# EAGLE board HFT-Core-Module_1V1 (EAGLE 7.7.0), part 1 of 4
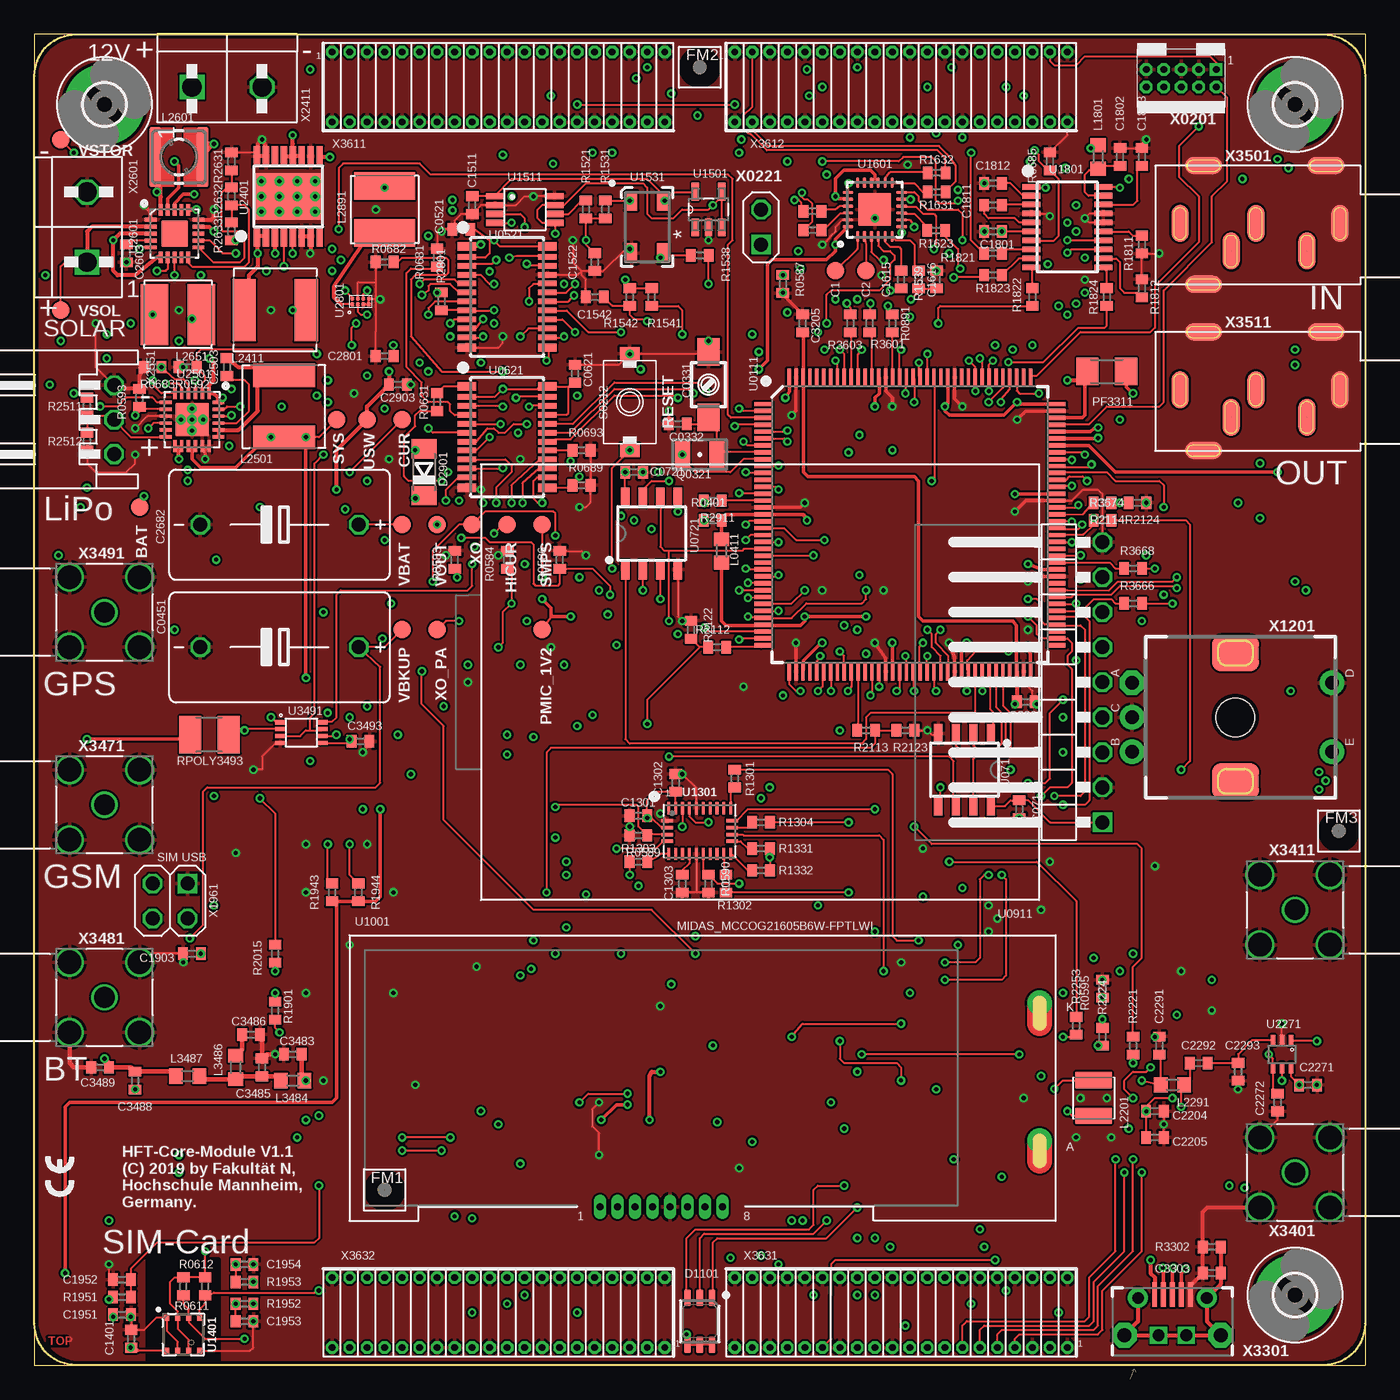
[diagram p0: board, top side]
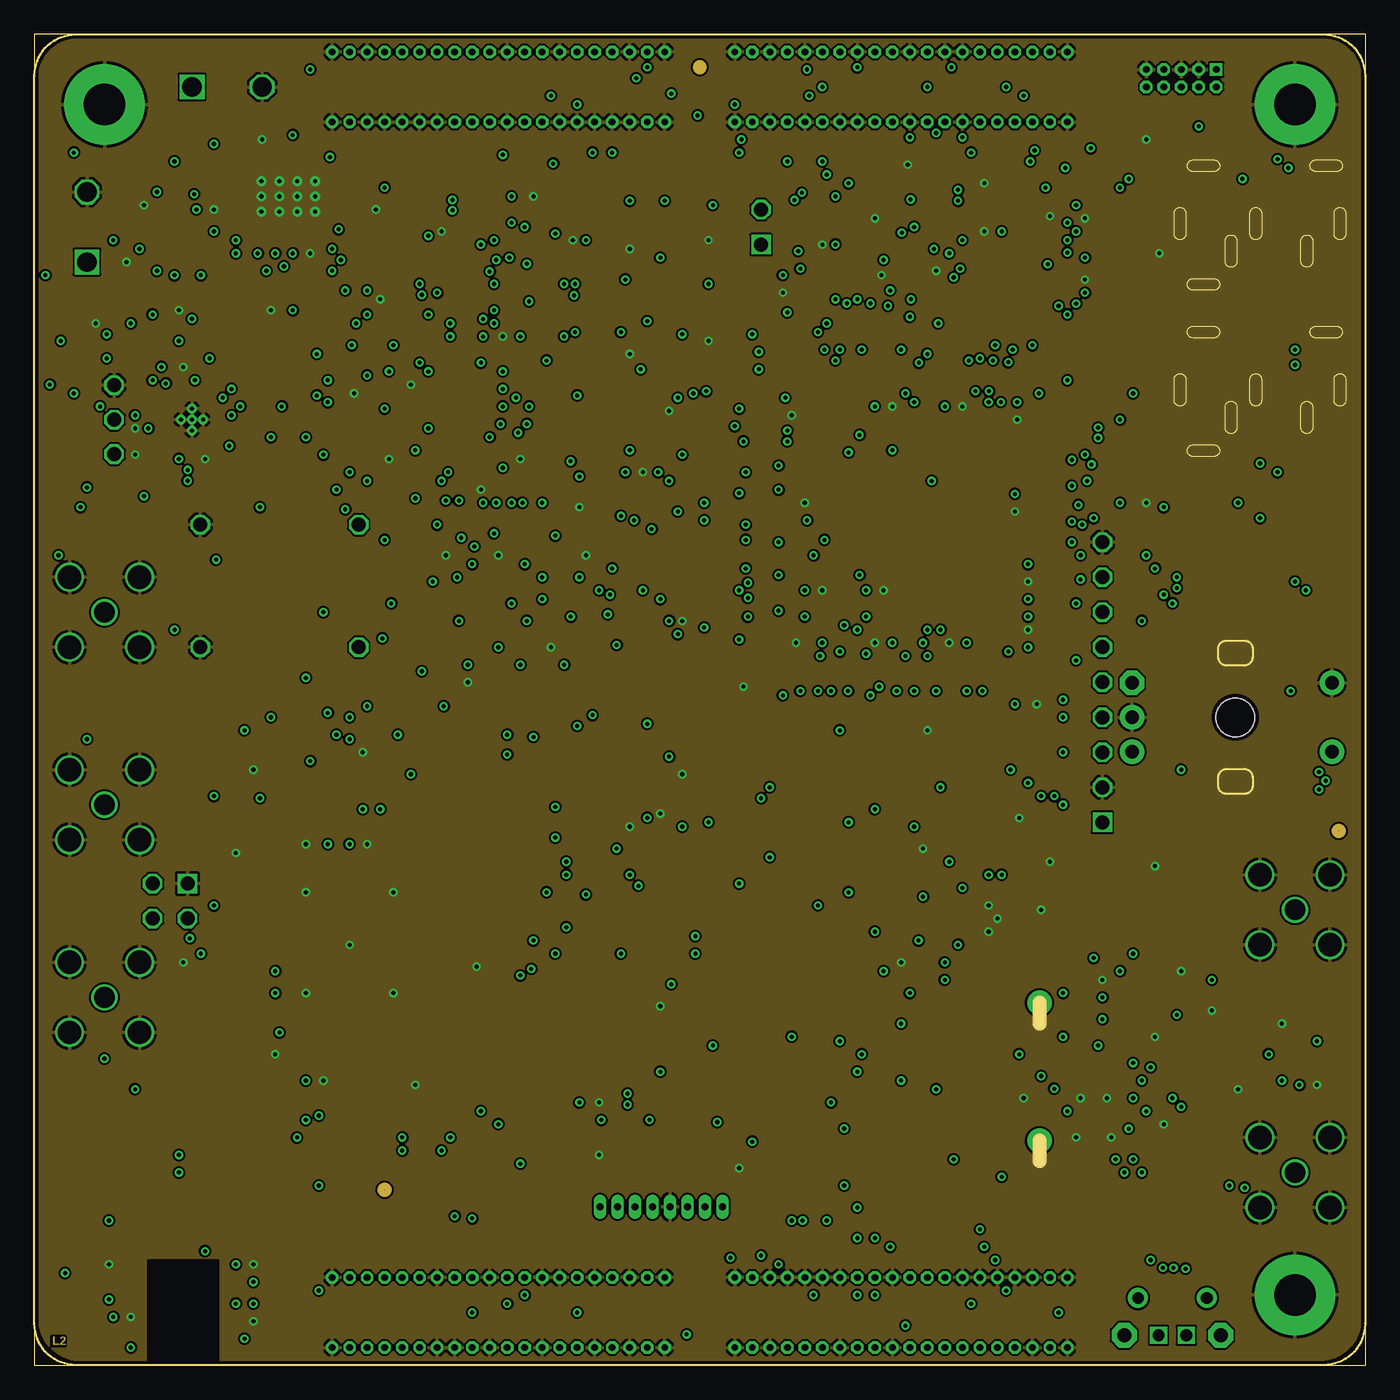
[diagram p1: board, inner layer Route2_GND_(Signal2)]
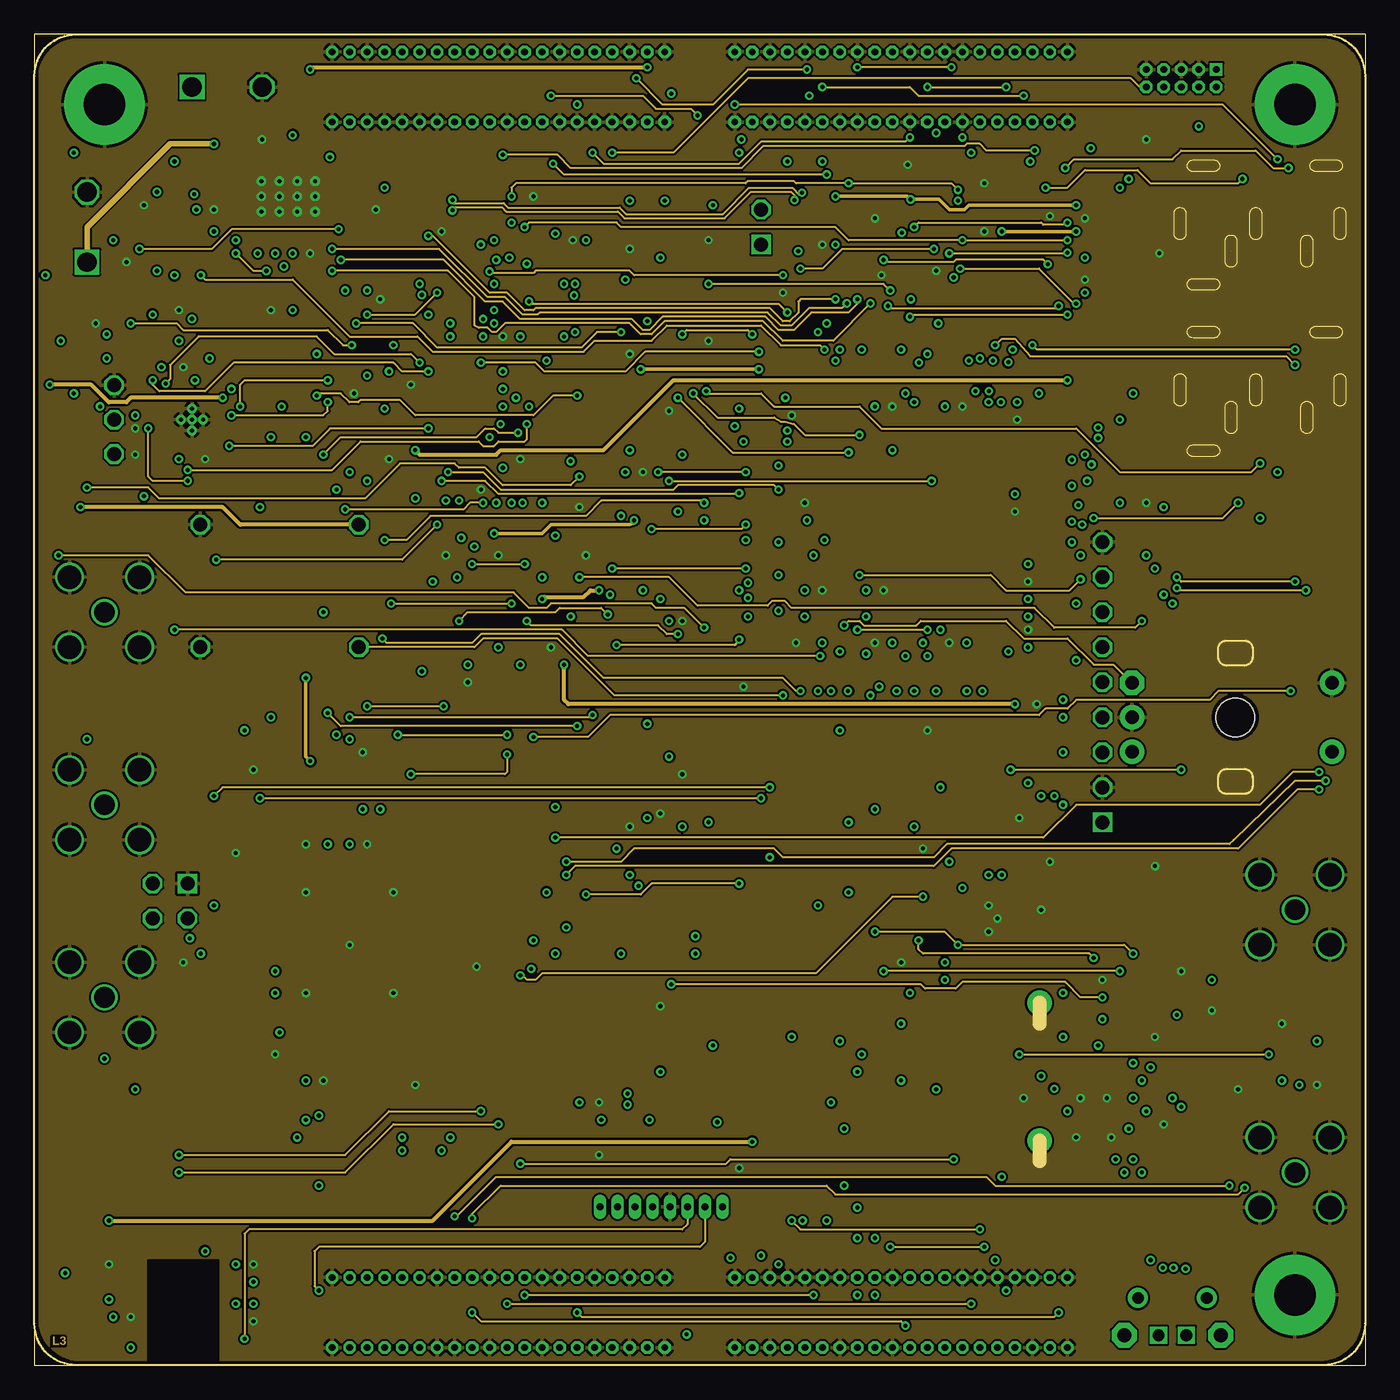
[diagram p2: board, inner layer Route3_Signal3_(GND)]
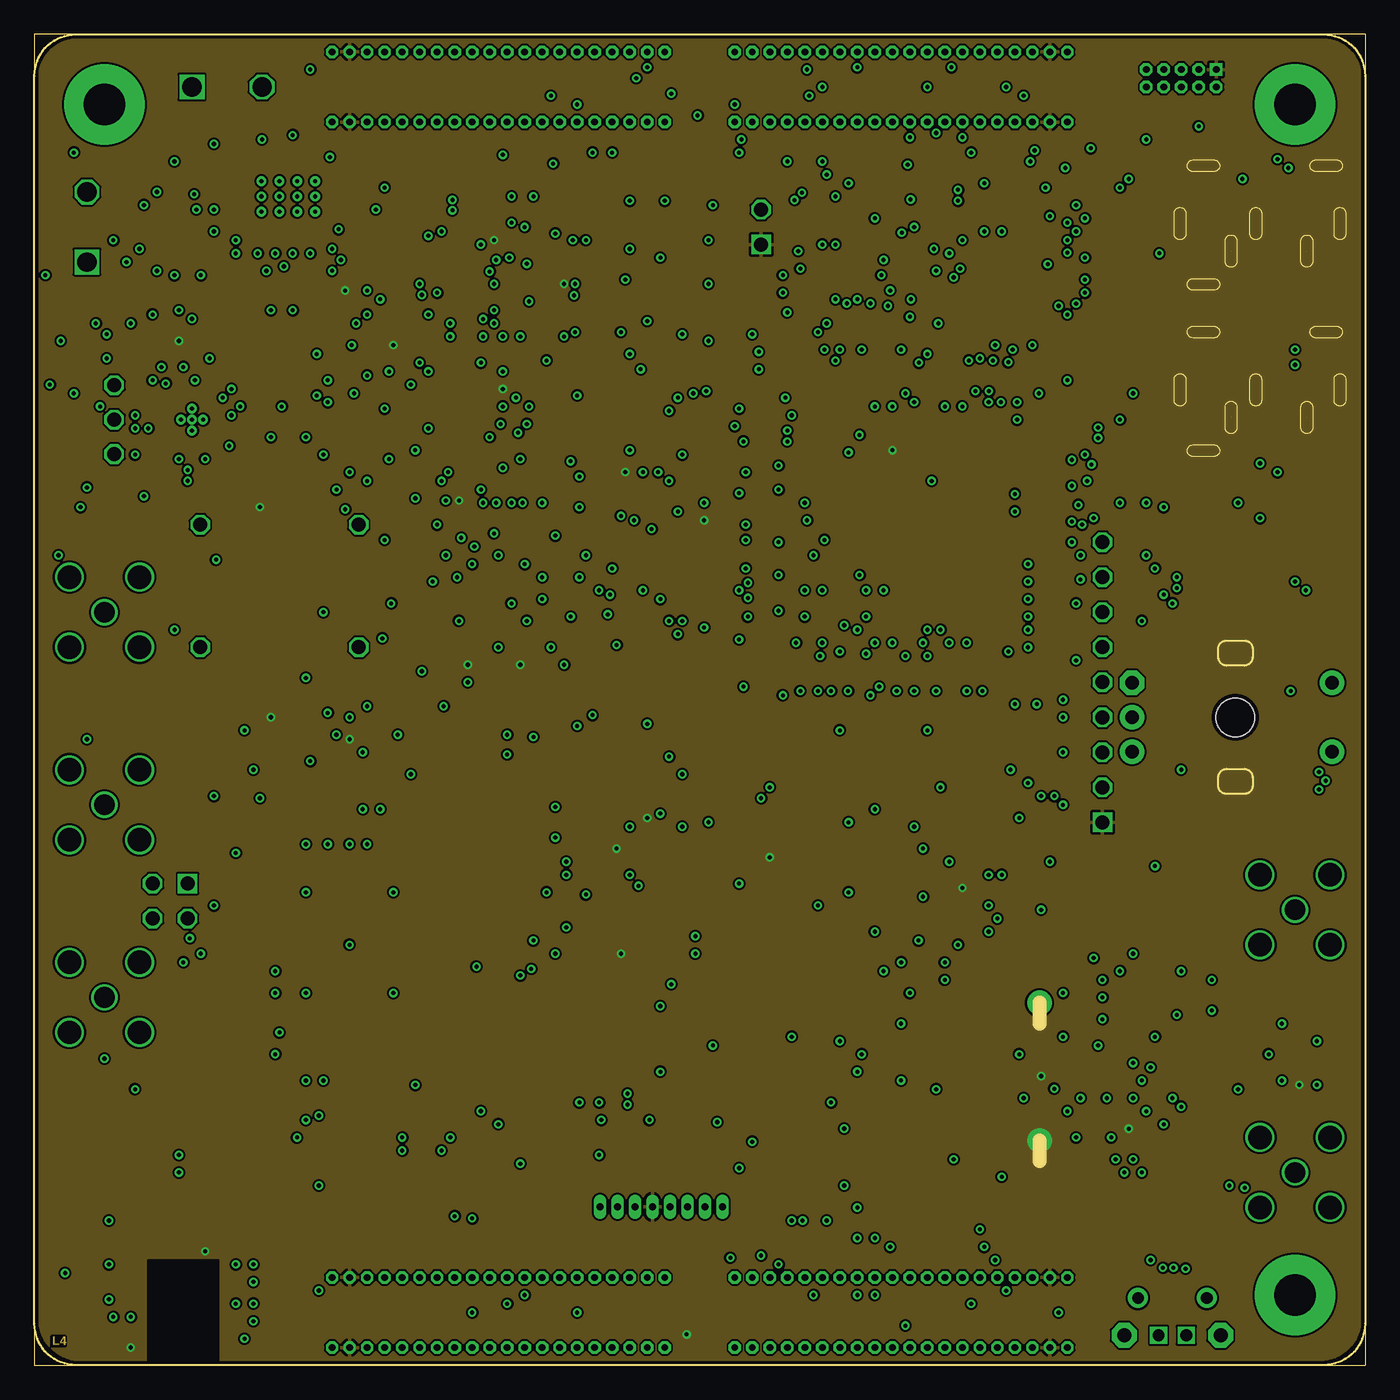
[diagram p3: board, inner layer Route14_3V3_(Signal4)]
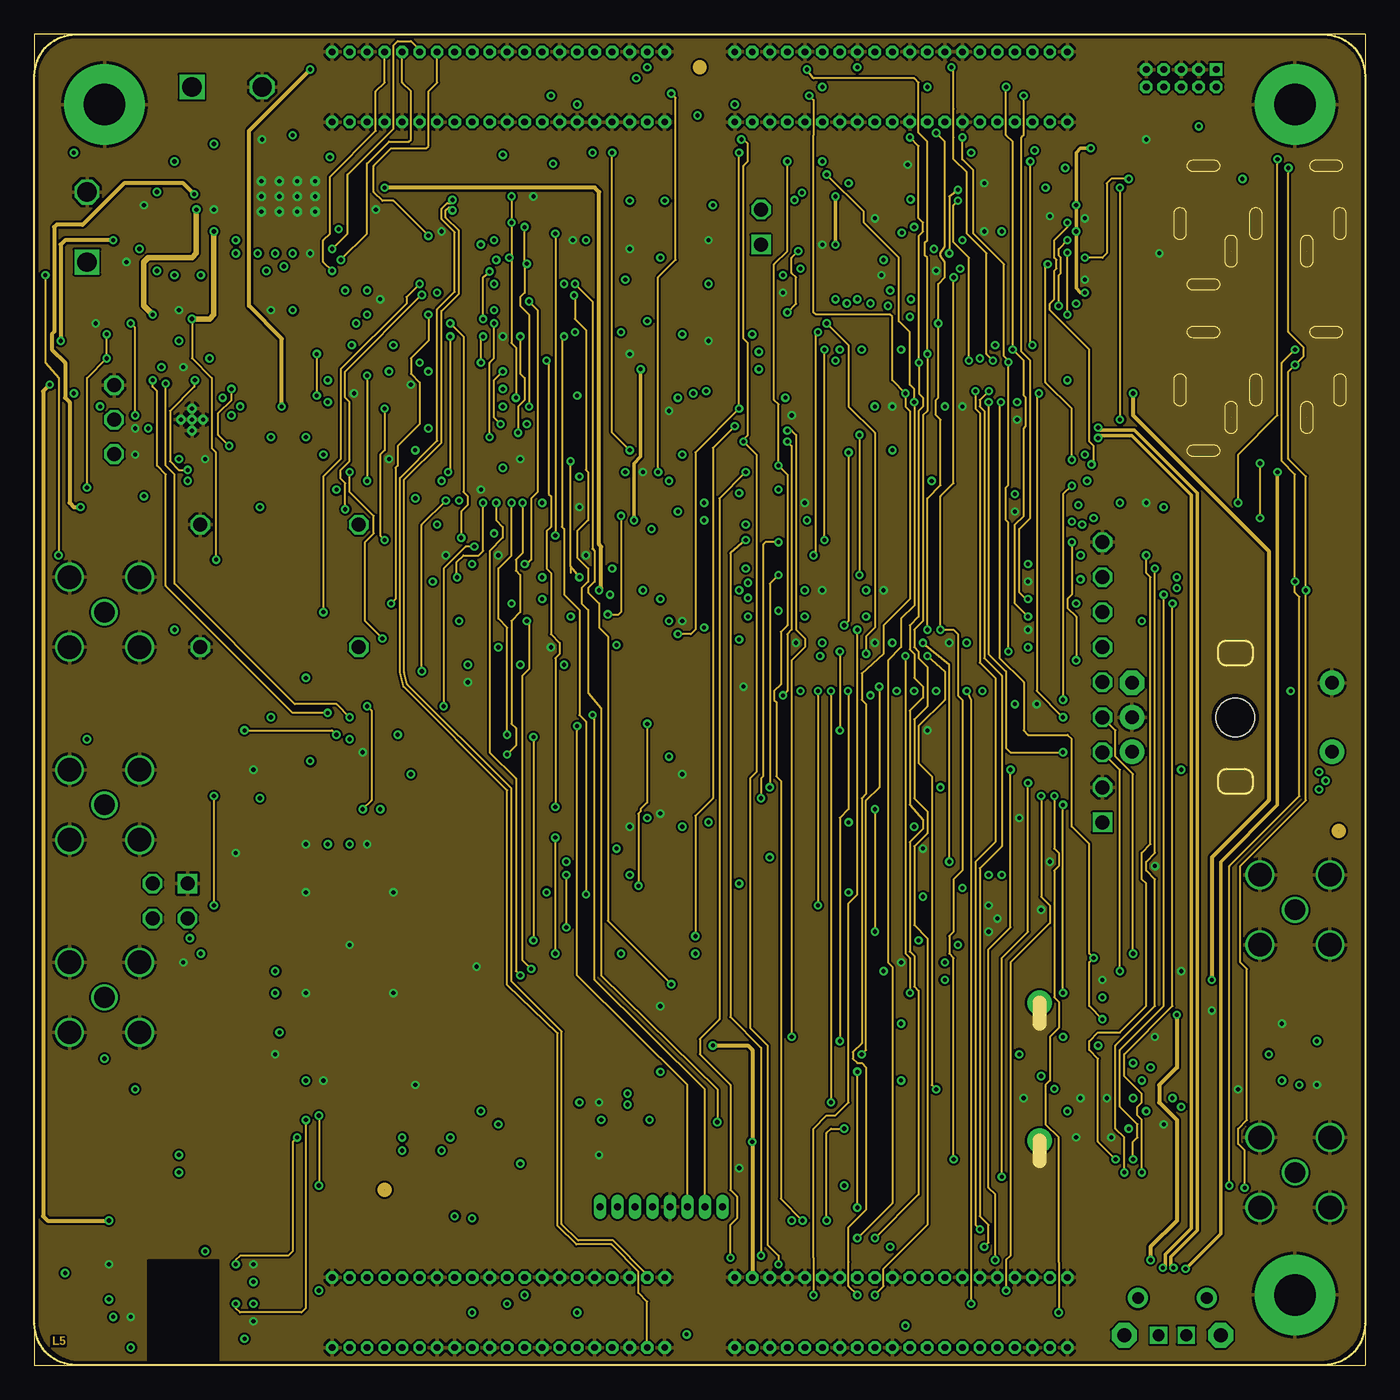
[diagram p4: board, inner layer Route15_Signal5_(GND)]
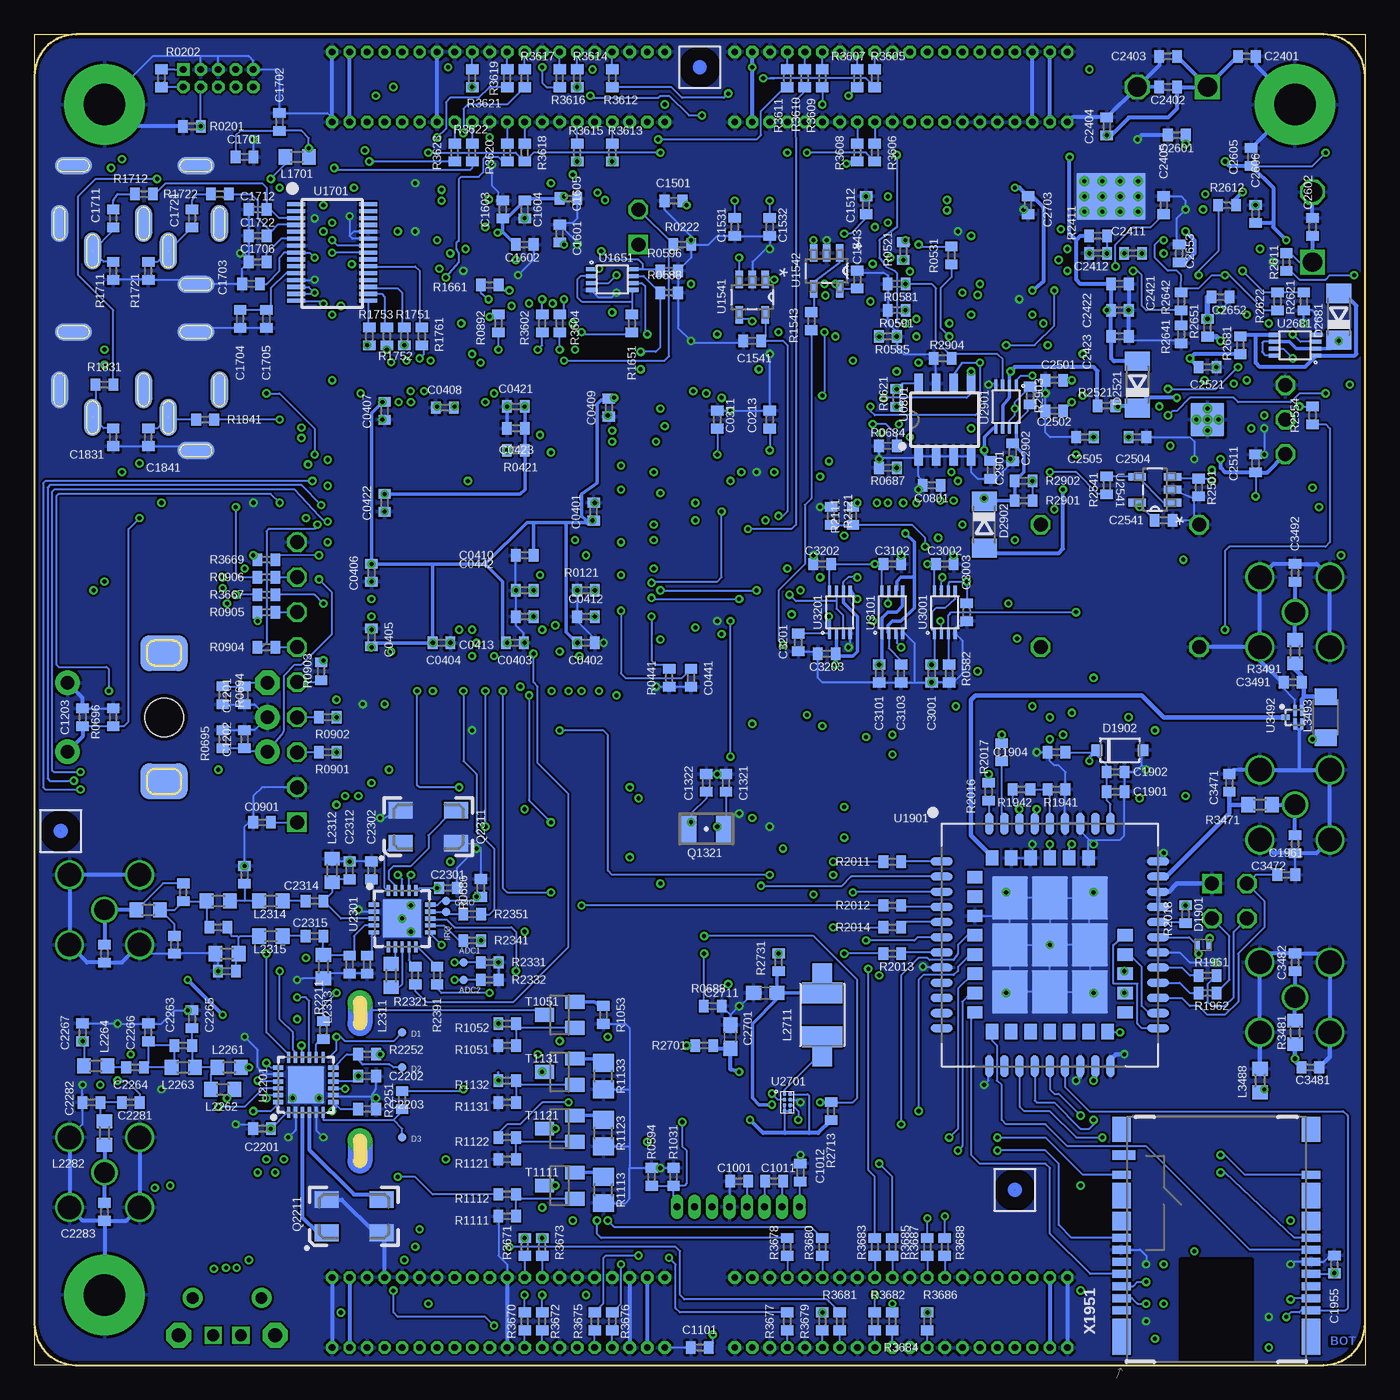
[diagram p5: board, bottom side, seen from below]

Size 96.52 x 96.52 mm. Coordinates in mm from the lower left corner, seen from the top.
Outline: 0,0 96.52,0 96.52,96.52 0,96.52 0,0
Copper layers (1+2+3*14+15+16): Top_Signal1_(GND) 0.035mm / dielectric 0.2mm / Route2_GND_(Signal2) 0.035mm / dielectric 0.36mm / Route3_Signal3_(GND) 0.035mm / dielectric 0.28mm / Route14_3V3_(Signal4) 0.035mm / dielectric 0.36mm / Route15_Signal5_(GND) 0.035mm / dielectric 0.2mm / Bottom_Signal6_(GND) 0.035mm
Design rules "HFT-Core-Module_1V1 *": minimum track width 0.15mm, minimum drill 0.3mm, track to track 0.15mm, track to pad 0.15mm, pad to pad 0.15mm, via to via 0.15mm, smd to smd 0.15mm, copper to edge 0.3mm, drill to drill 0.2mm, minimum pad ring 0.2mm, minimum via ring 0.15mm, stop-mask expansion 0.075mm, vias tented up to drill 0mil, thermal gap 0.2mm
Net classes: 1 pwr_relay: width 1.5 mm, clearance 0.5 mm; 2 pwr_ttl: width 0.75 mm, clearance 0.5 mm; 3 usb_pair: width 0.254 mm, clearance 0.152 mm; 4 pwrA5: width 0.305 mm; 5 single50R_1-2_15-16: width 0.33 mm, drill 0.305 mm, clearance 0.33 mm; 6 single50R_2-3-14_14-15-16: width 0.279 mm, drill 0.305 mm, clearance 0.279 mm; 7 +3V3: clearance 0.5 mm; 8 GND: clearance 0.5 mm
tRestrict: area 8.3,0 to 13.3,7.6
bRestrict: area 8.3,0 to 13.3,7.6
Milling: 8 lines

## Footprints (pad centres in the part's own frame; a part is rotated, then mirrored left to right if it is on the bottom)
C0402 = smd 0.7 x 0.9: 1 -0.65,0; 2 0.65,0
3MM2_X_2MM5 = smd 2 x 1.6: + -2.365,0; - 2.365,0
C115-080X160_POL = drill 1.016 octagon: + 5.75,0; - -5.75,0
C0603 = smd 1.1 x 1: 1 -0.85,0; 2 0.85,0
ASMT-YTB7_0AA02_RGB = smd 1.2 x 0.5: 1 -1.7,0.9; 2 -1.7,0; 3 -1.7,-0.9; 4 1.7,-0.9; 5 1.7,0; 6 1.7,0.9
SOD923 = smd 0.4 x 0.6: A 0.45,0; C -0.45,0
SOD123 = smd 0.85 x 0.85: A 1.675,0; C -1.675,0
SOD80C = smd 1.4 x 1.8: A 1.7,0; C -1.7,0
3,0-PAD = drill 3 pad 5.842: B3,0 0,0
L0603 = smd 1 x 1.1: 1 -0.85,0; 2 0.85,0
L_3.00MM_X_3.00MM = smd 1.2 x 2.7: 1 -1.3,0; 2 1.3,0
L_6.00MM_X_6.00MM = smd 1.7 x 4.5: 1 -2.25,0; 2 2.25,0
WE-TPC_3MM8-3MM8_R-1MM3 = smd 4.3 x 0.85: 1 0,1.725; 2 0,-1.725
L_4.90MM_X_4.90MM = smd 2 x 4.4: 1 -1.7,0; 2 1.7,0
L_4.50MM_X_3.20MM = smd 1.5 x 3: 1 -1.6,0; 2 1.6,0 | smd 2 x 1.5: 3 -2.75,0; 4 2.75,0
L3216C = smd 1.2 x 1.6: 1 -1.5,0; 2 1.5,0
M1206 = smd 1.6 x 2: 1 -1.4,0; 2 1.4,0
ABS07 = smd 1.1 x 1.9: 1 -1.25,0; 2 1.25,0
ABM3B = smd 1.8 x 1.2: 1 -2,-1.2; 2 2,-1.2; 3 2,1.2; 4 -2,1.2
R0402 = smd 0.7 x 0.9: 1 -0.65,0; 2 0.65,0
R0805 = smd 1.3 x 1.5: 1 -0.95,0; 2 0.95,0
R0603 = smd 1 x 1.1: 1 -0.85,0; 2 0.85,0
R1210 = smd 1.6 x 2.7: 1 -1.4,0; 2 1.4,0
KSR223G_SMD_1POL = smd 1 x 1.4: 1 -3.5,0; 2 3.5,0
SOT23 = smd 1 x 1.4: 1 -0.95,-1.1; 2 0.95,-1.1; 3 0,1.1
B1,27 = smd 1.27 x 1.27: TP 0,0
TP06R = smd 0.6 x 0.6: TP 0,0
LQFP144 = smd 1.35 x 0.325: 1 -10.65,8.75; 2 -10.65,8.25; 3 -10.65,7.75; 4 -10.65,7.25; 5 -10.65,6.75; 6 -10.65,6.25; 7 -10.65,5.75; 8 -10.65,5.25; 9 -10.65,4.75; 10 -10.65,4.25; 11 -10.65,3.75; 12 -10.65,3.25; 13 -10.65,2.75; 14 -10.65,2.25; 15 -10.65,1.75; 16 -10.65,1.25; 17 -10.65,0.75; 18 -10.65,0.25; 19 -10.65,-0.25; 20 -10.65,-0.75; 21 -10.65,-1.25; 22 -10.65,-1.75; 23 -10.65,-2.25; 24 -10.65,-2.75; 25 -10.65,-3.25; 26 -10.65,-3.75; 27 -10.65,-4.25; 28 -10.65,-4.75; 29 -10.65,-5.25; 30 -10.65,-5.75; 31 -10.65,-6.25; 32 -10.65,-6.75; 33 -10.65,-7.25; 34 -10.65,-7.75; 35 -10.65,-8.25; 36 -10.65,-8.75; 73 10.65,-8.75; 74 10.65,-8.25; 75 10.65,-7.75; 76 10.65,-7.25; 77 10.65,-6.75; 78 10.65,-6.25; 79 10.65,-5.75; 80 10.65,-5.25; 81 10.65,-4.75; 82 10.65,-4.25; 83 10.65,-3.75; 84 10.65,-3.25; 85 10.65,-2.75; 86 10.65,-2.25; 87 10.65,-1.75; 88 10.65,-1.25; 89 10.65,-0.75; 90 10.65,-0.25; 91 10.65,0.25; 92 10.65,0.75; 93 10.65,1.25; 94 10.65,1.75; 95 10.65,2.25; 96 10.65,2.75; 97 10.65,3.25; 98 10.65,3.75; 99 10.65,4.25; 100 10.65,4.75; 101 10.65,5.25; 102 10.65,5.75; 103 10.65,6.25; 104 10.65,6.75; 105 10.65,7.25; 106 10.65,7.75; 107 10.65,8.25; 108 10.65,8.75 | smd 0.325 x 1.35: 37 -8.75,-10.65; 38 -8.25,-10.65; 39 -7.75,-10.65; 40 -7.25,-10.65; 41 -6.75,-10.65; 42 -6.25,-10.65; 43 -5.75,-10.65; 44 -5.25,-10.65; 45 -4.75,-10.65; 46 -4.25,-10.65; 47 -3.75,-10.65; 48 -3.25,-10.65; 49 -2.75,-10.65; 50 -2.25,-10.65; 51 -1.75,-10.65; 52 -1.25,-10.65; 53 -0.75,-10.65; 54 -0.25,-10.65; 55 0.25,-10.65; 56 0.75,-10.65; 57 1.25,-10.65; 58 1.75,-10.65; 59 2.25,-10.65; 60 2.75,-10.65; 61 3.25,-10.65; 62 3.75,-10.65; 63 4.25,-10.65; 64 4.75,-10.65; 65 5.25,-10.65; 66 5.75,-10.65; 67 6.25,-10.65; 68 6.75,-10.65; 69 7.25,-10.65; 70 7.75,-10.65; 71 8.25,-10.65; 72 8.75,-10.65; 109 8.75,10.65; 110 8.25,10.65; 111 7.75,10.65; 112 7.25,10.65; 113 6.75,10.65; 114 6.25,10.65; 115 5.75,10.65; 116 5.25,10.65; 117 4.75,10.65; 118 4.25,10.65; 119 3.75,10.65; 120 3.25,10.65; 121 2.75,10.65; 122 2.25,10.65; 123 1.75,10.65; 124 1.25,10.65; 125 0.75,10.65; 126 0.25,10.65; 127 -0.25,10.65; 128 -0.75,10.65; 129 -1.25,10.65; 130 -1.75,10.65; 131 -2.25,10.65; 132 -2.75,10.65; 133 -3.25,10.65; 134 -3.75,10.65; 135 -4.25,10.65; 136 -4.75,10.65; 137 -5.25,10.65; 138 -5.75,10.65; 139 -6.25,10.65; 140 -6.75,10.65; 141 -7.25,10.65; 142 -7.75,10.65; 143 -8.25,10.65; 144 -8.75,10.65
TSSOP24_SOT355-1 = smd 0.6 x 1.35: 1 -3.675,-2.925; 12 3.675,-2.925; 13 3.675,2.925; 24 -3.675,2.925 | smd 0.4 x 1.35: 2 -2.925,-2.925; 3 -2.275,-2.925; 4 -1.625,-2.925; 5 -0.975,-2.925; 6 -0.325,-2.925; 7 0.325,-2.925; 8 0.975,-2.925; 9 1.625,-2.925; 10 2.275,-2.925; 11 2.925,-2.925; 14 2.925,2.925; 15 2.275,2.925; 16 1.625,2.925; 17 0.975,2.925; 18 0.325,2.925; 19 -0.325,2.925; 20 -0.975,2.925; 21 -1.625,2.925; 22 -2.275,2.925; 23 -2.925,2.925
SOIC8_150MIL = smd 0.6 x 1.4: 1 -1.905,-2.63; 2 -0.635,-2.63; 3 0.635,-2.63; 4 1.905,-2.63; 5 1.905,2.63; 6 0.635,2.63; 7 -0.635,2.63; 8 -1.905,2.63
ZIO_EINK_1IN54 = drill 1.016 square: 1 0,10.16 | drill 1.016 octagon: 2 0,7.62; 3 0,5.08; 4 0,2.54; 5 0,0; 6 0,-2.54; 7 0,-5.08; 8 0,-7.62; 9 0,-10.16
MIDAS_MCCOG21605B6W-FPTLWI = drill 0.5 pad 0.7 long: 1 18.155,1; 2 19.425,1; 3 20.695,1; 4 21.965,1; 5 23.235,1; 6 24.505,1; 7 25.775,1; 8 27.045,1 | drill 1 pad 1.8: 11 50.05,15.8; 12 50.05,5.8
BNO085_LGA28 = smd 0.25 x 0.875: 1 -2.25,1.663; 6 -2.25,-1.663; 7 -1.75,-1.663; 8 -1.25,-1.663; 9 -0.75,-1.663; 10 -0.25,-1.663; 11 0.25,-1.663; 12 0.75,-1.663; 13 1.25,-1.663; 14 1.75,-1.663; 15 2.25,-1.663; 20 2.25,1.663; 21 1.75,1.663; 22 1.25,1.663; 23 0.75,1.663; 24 0.25,1.663; 25 -0.25,1.663; 26 -0.75,1.663; 27 -1.25,1.663; 28 -1.75,1.663 | smd 0.875 x 0.25: 2 -2.362,0.75; 3 -2.362,0.25; 4 -2.362,-0.25; 5 -2.362,-0.75; 16 2.362,-0.75; 17 2.362,-0.25; 18 2.362,0.25; 19 2.362,0.75
BME680 = smd 0.4 x 0.4: 1 1.2,1.2; 2 1.2,0.4; 3 1.2,-0.4; 4 1.2,-1.2; 5 -1.2,-1.2; 6 -1.2,-0.4; 7 -1.2,0.4; 8 -1.2,1.2
SOT95P285X120-5N = smd 1.27 x 0.533: 1 -1.295,0.965; 2 -1.295,0; 3 -1.295,-0.965; 4 1.295,-0.965; 5 1.295,0.965
µMAX8 = smd 1.35 x 0.4: 1 -2.15,0.975; 2 -2.15,0.325; 3 -2.15,-0.325; 4 -2.15,-0.975; 5 2.15,-0.975; 6 2.15,-0.325; 7 2.15,0.325; 8 2.15,0.975
CFPT-141 = smd 0.9 x 1.4: 1 -1.15,1.9; 2 -1.15,-1.9; 3 1.15,-1.9; 4 1.15,1.9
SOT-23-5 = smd 1.27 x 0.559: 1 -1.295,0.94; 2 -1.295,0; 3 -1.295,-0.94; 4 1.295,-0.94; 5 1.295,0.94
QFN24_P0MM5_CTRPAD = smd 0.8 x 0.25: 1 -1.95,1.25; 2 -1.95,0.75; 3 -1.95,0.25; 4 -1.95,-0.25; 5 -1.95,-0.75; 6 -1.95,-1.25; 13 1.95,-1.25; 14 1.95,-0.75; 15 1.95,-0.25; 16 1.95,0.25; 17 1.95,0.75; 18 1.95,1.25 | smd 0.25 x 0.8: 7 -1.25,-1.95; 8 -0.75,-1.95; 9 -0.25,-1.95; 10 0.25,-1.95; 11 0.75,-1.95; 12 1.25,-1.95; 19 1.25,1.95; 20 0.75,1.95; 21 0.25,1.95; 22 -0.25,1.95; 23 -0.75,1.95; 24 -1.25,1.95 | smd 2.4 x 2.4: 25 0,0
R-PDSO-G8 = smd 0.25 x 0.75: 1 -0.75,-1.55; 2 -0.25,-1.55; 3 0.25,-1.55; 4 0.75,-1.55; 5 0.75,1.55; 6 0.25,1.55; 7 -0.25,1.55; 8 -0.75,1.55
R-PDSO-G30 = smd 0.3 x 1.3: 1 -2.925,-2.6; 2 -2.425,-2.6; 3 -1.925,-2.6; 4 -1.425,-2.6; 5 -0.925,-2.6; 6 -0.425,-2.6; 7 0.075,-2.6; 8 0.575,-2.6; 9 1.075,-2.6; 10 1.575,-2.6; 11 2.075,-2.6; 12 2.575,-2.6; 13 3.075,-2.6; 14 3.575,-2.6; 15 4.075,-2.6; 16 4.075,2.6; 17 3.575,2.6; 18 3.075,2.6; 19 2.575,2.6; 20 2.075,2.6; 21 1.575,2.6; 22 1.075,2.6; 23 0.575,2.6; 24 0.075,2.6; 25 -0.425,2.6; 26 -0.925,2.6; 27 -1.425,2.6; 28 -1.925,2.6; 29 -2.425,2.6; 30 -2.925,2.6
TSSOP20 = smd 0.4 x 1.3: 1 -2.925,-2.6; 2 -2.275,-2.6; 3 -1.625,-2.6; 4 -0.975,-2.6; 5 -0.325,-2.6; 6 0.325,-2.6; 7 0.975,-2.6; 8 1.625,-2.6; 9 2.275,-2.6; 10 2.925,-2.6; 11 2.925,2.6; 12 2.275,2.6; 13 1.625,2.6; 14 0.975,2.6; 15 0.325,2.6; 16 -0.325,2.6; 17 -0.975,2.6; 18 -1.625,2.6; 19 -2.275,2.6; 20 -2.925,2.6
SIM868 = smd 1.6 x 0.6: 1 -7.85,6.05; 2 -7.85,4.95; 3 -7.85,3.85; 4 -7.85,2.75; 5 -7.85,1.65; 6 -7.85,0.55; 7 -7.85,-0.55; 8 -7.85,-1.65; 9 -7.85,-2.75; 10 -7.85,-3.85; 11 -7.85,-4.95; 12 -7.85,-6.05; 22 7.85,-6.05; 23 7.85,-4.95; 24 7.85,-3.85; 25 7.85,-2.75; 26 7.85,-1.65; 27 7.85,-0.55; 28 7.85,0.55; 29 7.85,1.65; 30 7.85,2.75; 31 7.85,3.85; 32 7.85,4.95; 33 7.85,6.05 | smd 0.6 x 1.6: 13 -4.4,-8.8; 14 -3.3,-8.8; 15 -2.2,-8.8; 16 -1.1,-8.8; 17 0,-8.8; 18 1.1,-8.8; 19 2.2,-8.8; 20 3.3,-8.8; 21 4.4,-8.8; 34 4.4,8.8; 35 3.3,8.8; 36 2.2,8.8; 37 1.1,8.8; 38 0,8.8; 39 -1.1,8.8; 40 -2.2,8.8; 41 -3.3,8.8; 42 -4.4,8.8 | smd 1.1 x 0.9: 43 -5.45,4.9; 44 -5.45,3.5; 45 -5.45,2.1; 46 -5.45,0.7; 47 -5.45,-0.7; 48 -5.45,-2.1; 49 -5.45,-3.5; 50 -5.45,-4.9; 58 5.45,-4.9; 59 5.45,-3.5; 60 5.45,-2.1; 61 5.45,-0.7; 62 5.45,0.7 | smd 0.9 x 1.1: 51 -4.2,-6.3; 52 -2.8,-6.3; 53 -1.4,-6.3; 54 0,-6.3; 55 1.4,-6.3; 56 2.8,-6.3; 57 4.2,-6.3; 63 2.8,6.3; 64 1.4,6.3; 65 0,6.3; 66 -1.4,6.3; 67 -2.8,6.3; 68 -4.2,6.3 | smd 2.6 x 3.1: 69 -2.9,3.4; 70 -2.9,0; 71 -2.9,-3.4; 72 0,-3.4; 73 2.9,-3.4; 74 2.9,0; 75 2.9,3.4; 76 0,3.4; 77 0,0
QFN24-4X4-0P5-PAD = smd 0.8 x 0.3: 1 -2,1.25; 2 -2,0.75; 3 -2,0.25; 4 -2,-0.25; 5 -2,-0.75; 6 -2,-1.25; 13 2,-1.25; 14 2,-0.75; 15 2,-0.25; 16 2,0.25; 17 2,0.75; 18 2,1.25 | smd 0.3 x 0.8: 7 -1.25,-2; 8 -0.75,-2; 9 -0.25,-2; 10 0.25,-2; 11 0.75,-2; 12 1.25,-2; 19 1.25,2; 20 0.75,2; 21 0.25,2; 22 -0.25,2; 23 -0.75,2; 24 -1.25,2 | smd 2.65 x 2.65: 25 0,0
SC-70_6-LEAD_2X1MM25_0P65 = smd 0.4 x 0.8: 1 -0.65,-1; 2 0,-1; 3 0.65,-1; 4 0.65,1; 5 0,1; 6 -0.65,1
QFN20-4X4-0P5-PAD = smd 0.8 x 0.3: 1 -2.05,1; 2 -2.05,0.5; 3 -2.05,0; 4 -2.05,-0.5; 5 -2.05,-1; 11 2.05,-1; 12 2.05,-0.5; 13 2.05,0; 14 2.05,0.5; 15 2.05,1 | smd 0.3 x 0.8: 6 -1,-2.05; 7 -0.5,-2.05; 8 0,-2.05; 9 0.5,-2.05; 10 1,-2.05; 16 1,2.05; 17 0.5,2.05; 18 0,2.05; 19 -0.5,2.05; 20 -1,2.05 | smd 2.75 x 2.75: 21 0,0
HTSSOP16 = smd 0.45 x 1.5: 1 -2.275,-2.9; 2 -1.625,-2.9; 3 -0.975,-2.9; 4 -0.325,-2.9; 5 0.325,-2.9; 6 0.975,-2.9; 7 1.625,-2.9; 8 2.275,-2.9; 9 2.275,2.9; 10 1.625,2.9; 11 0.975,2.9; 12 0.325,2.9; 13 -0.325,2.9; 14 -0.975,2.9; 15 -1.625,2.9; 16 -2.275,2.9 | drill 0.305: PAD 0.65,0; PAD3 -0.65,0; PAD4 -1.95,0; PAD5 1.95,0; PAD6 1.95,1.1; PAD7 1.95,-1.1; PAD8 0.65,1.1; PAD9 0.65,-1.1; PAD10 -0.65,1.1; PAD11 -0.65,-1.1; PAD12 -1.95,1.1; PAD13 -1.95,-1.1 | smd 5 x 3.4: PAD1 0,0 | smd 5 x 3.4 bottom: PAD2 0,0
VQFN-24 = smd 0.85 x 0.24: 1 -1.913,1.25; 2 -1.913,0.75; 3 -1.913,0.25; 4 -1.913,-0.25; 5 -1.913,-0.75; 6 -1.913,-1.25; 13 1.913,-1.25; 14 1.913,-0.75; 15 1.913,-0.25; 16 1.913,0.25; 17 1.913,0.75; 18 1.913,1.25 | smd 0.24 x 0.85: 7 -1.25,-1.913; 8 -0.75,-1.913; 9 -0.25,-1.913; 10 0.25,-1.913; 11 0.75,-1.913; 12 1.25,-1.913; 19 1.25,1.913; 20 0.75,1.913; 21 0.25,1.913; 22 -0.25,1.913; 23 -0.75,1.913; 24 -1.25,1.913 | smd 2.45 x 2.45: 25 0,0 | smd 2.45 x 2.45 bottom: 26 0,0 | drill 0.305: P$1 0,0; P$2 0,-0.8; P$3 0,0.8; P$4 0.8,0; P$5 -0.8,0
V-PVQFN-20 = smd 0.85 x 0.28: 1 -1.725,1; 2 -1.725,0.5; 3 -1.725,0; 4 -1.725,-0.5; 5 -1.725,-1; 11 1.725,-1; 12 1.725,-0.5; 13 1.725,0; 14 1.725,0.5; 15 1.725,1 | smd 0.28 x 0.85: 6 -1,-1.725; 7 -0.5,-1.725; 8 0,-1.725; 9 0.5,-1.725; 10 1,-1.725; 16 1,1.725; 17 0.5,1.725; 18 0,1.725; 19 -0.5,1.725; 20 -1,1.725 | smd 1.9 x 1.9: 21 0,0
WCSP-8 = smd 0.27 x 0.27: 1A -0.2,0.6; 1B -0.2,0.2; 1C -0.2,-0.2; 1D -0.2,-0.6; 2A 0.2,0.6; 2B 0.2,0.2; 2C 0.2,-0.2; 2D 0.2,-0.6
QCS5P = smd 0.65 x 0.325: 1 -0.7,0 | smd 0.25 x 0.725: 2 0,-0.487; 3 0.5,-0.487; 4 0.5,0.487; 5 0,0.487
2X05_1MM27_SHROUDED_CORTEX_JTAG_SWD = drill 0.5 pad 0.914 square: 1 -2.54,-0.635 | drill 0.5 pad 0.914 octagon: 2 -2.54,0.635; 3 -1.27,-0.635; 4 -1.27,0.635; 5 0,-0.635; 6 0,0.635; 7 1.27,-0.635; 8 1.27,0.635; 9 2.54,-0.635; 10 2.54,0.635
1X02 = drill 1.016 square: 1 0,0 | drill 1.016 octagon: 2 0,2.54
TTE_EN11-HSM = drill 1 pad 1.75 octagon: A -2.5,-7.5 | drill 1 pad 1.75: B 2.5,-7.5; C 0,-7.5; D -2.5,7; E 2.5,7 | smd 2.6 x 3.4: GND11 -4.65,0; GND12 4.65,0 | smd 2.6 x 3.4 bottom: GND21 -4.65,0; GND22 4.65,0 | hole 2.8: 0,0
MICROSIM-8P_SDCARD-8P_MOLEX-104642-1610 = smd 1.35 x 2.6: G1 -6.875,-7.04; G8 6.875,-7.04 | smd 1.35 x 1.34: G2 -6.875,1.36; G7 6.875,1.36 | smd 1.35 x 1.84: G3 -6.875,3.2; G6 6.875,3.2 | smd 1.35 x 1.8: G4 -6.875,8.01; G5 6.875,8.01 | smd 1.35 x 0.58: S1 6.875,-5.13; S2 6.875,-4.25; S3 -6.875,-4.25; S4 -6.875,-5.13; S5 6.875,-1.61; S6 6.875,-3.37; S7 -6.875,-3.37; S8 -6.875,-1.61; T1 6.875,4.71; T2 6.875,0.15; T3 6.875,-0.73; T4 6.875,-2.49; T5 -6.875,-2.49; T6 -6.875,-0.73; T7 -6.875,0.15; T8 -6.875,4.71 | smd 1.7 x 0.7: SW -6.7,6.125
2X02 = drill 1.016 square: 1 -1.27,-1.27 | drill 1.016 octagon: 2 -1.27,1.27; 3 1.27,-1.27; 4 1.27,1.27
WIRE-TO-BOARD_5MM08_1X02 = drill 1.4 square: 1 0,2.54 | drill 1.4 octagon: 2 0,-2.54
JST_S3B-XH-A = drill 1.016 octagon: 1 -2.5,-4.5; 2 0,-4.5; 3 2.5,-4.5
USB-B-MICRO-SMD_MOLEX-105017-0001 = smd 0.35 x 1.8: D+ 0,4.4; D- -0.65,4.4; GND 1.3,4.4; ID 0.65,4.4; VBUS -1.3,4.4 | drill 0.85 pad 1.45: JSHIELD -2.5,4.15; JSHIELD@2 2.5,4.15 | drill 1 pad 1.8 octagon: JSHIELD@3 -3.5,1.45; JSHIELD@6 3.5,1.45 | drill 0.85 square: JSHIELD@4 -1,1.45; JSHIELD@5 1,1.45
SMA_SMT_AMPHENOL_901-143 = drill 1.499: 1 0,0 | drill 1.702: 2 -2.54,2.54; 3 -2.54,-2.54; 4 2.54,-2.54; 5 2.54,2.54
SJ1-353XNS_3MM5-STEREO-AUDIO-JACKS = smd 1.25 x 2.7: 11 -4.532,-0.9; 12 -2.132,1.1; 13 3.368,1.1; 14 7.067,-0.9; 15 1.567,-0.9 | smd 1.25 x 2.7 bottom: 21 -4.532,-0.9; 22 -2.132,1.1; 23 3.368,1.1; 24 7.067,-0.9; 25 1.567,-0.9 | smd 2.7 x 1.25: 51 5.378,3.514; 52 5.378,-5.086; 53 -3.522,-5.086 | smd 2.7 x 1.25 bottom: 61 5.378,3.514; 62 5.378,-5.086; 63 -3.522,-5.086
2X20/90_1MM27_HARWIN_M50-3202045_SOCKET = drill 0.5 pad 0.762 octagon: 1 -12.7,0; 2 -12.7,-5.08; 3 -11.43,0; 4 -11.43,-5.08; 5 -10.16,0; 6 -10.16,-5.08; 7 -8.89,0; 8 -8.89,-5.08; 9 -7.62,0; 10 -7.62,-5.08; 11 -6.35,0; 12 -6.35,-5.08; 13 -5.08,0; 14 -5.08,-5.08; 15 -3.81,0; 16 -3.81,-5.08; 17 -2.54,0; 18 -2.54,-5.08; 19 -1.27,0; 20 -1.27,-5.08; 21 0,0; 22 0,-5.08; 23 1.27,0; 24 1.27,-5.08; 25 2.54,0; 26 2.54,-5.08; 27 3.81,0; 28 3.81,-5.08; 29 5.08,0; 30 5.08,-5.08; 31 6.35,0; 32 6.35,-5.08; 33 7.62,0; 34 7.62,-5.08; 35 8.89,0; 36 8.89,-5.08; 37 10.16,0; 38 10.16,-5.08; 39 11.43,0; 40 11.43,-5.08

## Placement (x,y rotation side)
C0213  100nF  [C0402]  43.18,68.58 90 bottom
C0311  22pF  [C0402]  46.99,68.58 90 bottom
C0331  JR200  [3MM2_X_2MM5]  48.9,71.12 270 top
C0332  18pF  [C0402]  46.67,68.26 180 top
C0401  100nF  [C0402]  55.96,61.91 90 bottom
C0402  100nF  [C0402]  56.52,52.39 0 bottom
C0403  100nF  [C0402]  61.67,52.39 0 bottom
C0404  100nF  [C0402]  66.99,52.39 0 bottom
C0405  100nF  [C0402]  72.07,52.78 90 bottom
C0406  100nF  [C0402]  72.07,57.47 270 bottom
C0407  100nF  [C0402]  71.12,69.22 270 bottom
C0408  100nF  [C0402]  66.75,69.45 180 bottom
C0409  100nF  [C0402]  54.85,69.45 270 bottom
C0410  4.7uF  [C0402]  60.96,58.74 180 bottom
C0412  10nF  [C0402]  56.52,54.29 180 bottom
C0413  1uF  [C0402]  60.96,54.29 180 bottom
C0421  100nF  [C0402]  61.59,69.53 0 bottom
C0422  100nF  [C0402]  71.12,62.55 270 bottom
C0423  4.7uF  [C0402]  61.59,67.94 180 bottom
C0441  100nF  [C0402]  50.48,49.85 90 bottom
C0442  1uF  [C0402]  60.96,56.2 0 bottom
C0451  1F_6V_SCMR18H105MRBB0  [C115-080X160_POL]  17.78,52.07 0 top
C0521  100nF  [C0402]  30.96,82.39 180 top
C0621  100nF  [C0402]  39.21,71.91 90 top
C0711  220nF  [C0402]  71.44,40.32 270 top
C0721  220nF  [C0402]  43.5,64.77 0 top
C0801  220nF  [C0402]  31.43,63.82 180 bottom
C0901  100nF  [C0402]  80.01,39.37 180 bottom
C1001  100nF  [C0402]  45.4,13.34 180 bottom
C1011  1uF  [C0402]  42.86,13.34 0 bottom
C1012  1uF  [C0402]  40.96,13.97 90 bottom
C1101  100nF  [C0402]  48.26,1.27 180 bottom
C1201  1nF  [C0402]  81.28,48.58 270 bottom
C1202  1nF  [C0402]  81.28,45.4 90 bottom
C1203  1nF  [C0402]  93.03,46.99 90 bottom
C1301  100nF  [C0402]  43.81,39.85 180 top
C1302  100nF  [C0402]  46.51,42.23 90 top
C1303  100nF  [C0402]  46.99,34.92 270 top
C1321  22pF  [C0402]  46.35,42.23 90 bottom
C1322  22pF  [C0402]  47.78,42.23 90 bottom
C1401  100nF  [C0402]  7.02,1.91 90 top
C1501  100nF  [C0402]  50.16,84.45 180 bottom
C1511  100nF  [C0402]  31.75,84.14 270 top
C1512  100nF  [C0402]  36.2,84.14 90 bottom
C1522  1uF  [C0402]  40.64,80.01 270 top
C1531  100nF  [C0402]  45.72,82.55 270 bottom
C1532  100pF  [C0402]  43.18,82.55 270 bottom
C1541  100nF  [C0402]  44.45,74.3 180 bottom
C1542  1nF  [C0402]  40.64,77.47 180 top
C1543  100nF  [C0402]  36.83,78.74 90 bottom
C1601  220nF  [C0402]  58.42,82.07 90 bottom
C1602  100nF  [C0402]  60.96,81.28 0 bottom
C1603  100nF  [C0402]  62.55,83.82 90 bottom
C1604  220nF  [C0402]  60.96,83.82 270 bottom
C1605  100nF  [C0402]  57.78,84.61 180 bottom
C1615  10nF  [C0402]  62.87,78.74 90 top
C1616  10nF  [C0402]  64.14,78.74 90 top
C1701  10uF  [C0402]  81.28,87.63 0 bottom
C1702  100nF  [C0402]  78.74,90.17 90 bottom
C1703  100nF  [C0402]  80.8,78.42 0 bottom
C1704  10uF  [C0402]  81.6,75.88 270 bottom
C1705  100nF  [C0402]  79.69,75.88 270 bottom
C1706  2.2uF  [C0402]  80.33,80.01 180 bottom
C1711  10uF  [C0402]  90.81,83.19 90 bottom
C1712  10nF  [C0402]  80.33,83.82 180 bottom
C1721  10uF  [C0402]  85.09,83.19 90 bottom
C1722  10nF  [C0402]  80.33,81.92 180 bottom
C1801  4.7uF  [C0402]  69.53,82.23 180 top
C1802  4.7uF  [C0402]  78.74,87.63 270 top
C1803  2.2uF  [C0402]  80.33,87.63 270 top
C1811  1uF  [C0402]  69.53,84.14 0 top
C1812  1uF  [C0402]  69.53,85.72 0 top
C1831  2.7nF  [C0402]  90.81,67.31 270 bottom
C1841  2.7nF  [C0402]  88.27,67.31 270 bottom
C1901  47pF  [C0402]  18.1,41.59 180 bottom
C1902  100nF  [C0402]  18.1,43.02 180 bottom
C1903  10nF  [C0402]  11.43,29.84 0 top
C1904  10uF  [C0402]  22.38,44.45 0 bottom
C1951  220nF  [C0402]  6.35,3.65 0 top
C1952  22pF  [C0402]  6.35,6.19 0 top
C1953  22pF  [C0402]  15.24,3.17 180 top
C1954  22pF  [C0402]  15.24,7.3 180 top
C1955  220nF  [C0402]  2.22,7.3 90 bottom
C1961  1uF  [C0402]  5.71,35.56 180 bottom
C2201  10uF  [C0402]  80.01,17.14 180 bottom
C2202  100nF  [C0402]  72.39,20.95 0 bottom
C2203  470nF  [C0402]  72.39,18.57 0 bottom
C2204  47pF  [C0402]  81.28,18.41 0 top
C2205  47nF  [C0402]  81.28,16.51 0 top
C2263  3.3pF  [C0402]  85.72,23.18 180 bottom
C2264  39pF  [C0402]  89.22,21.59 180 bottom
C2265  0pF  [C0402]  85.09,25.08 270 bottom
C2266  5.6pF  [C0402]  88.27,24.13 90 bottom
C2267  2.2pF  [C0402]  93.03,24.13 90 bottom
C2271  100nF  [C0402]  92.39,20.32 0 top
C2272  1nF  [C0402]  90.17,19.05 270 top
C2281  39pF  [C0402]  89.53,19.05 180 bottom
C2282  3.3pF  [C0402]  92.39,19.05 0 bottom
C2283  3.3pF  [C0402]  91.44,11.11 90 bottom
C2291  1.8pF  [C0402]  81.6,23.18 270 top
C2292  2.4pF  [C0402]  84.45,21.91 0 top
C2293  0pF  [C0402]  87.31,21.27 90 top
C2301  100nF  [C0402]  66.52,34.61 0 bottom
C2302  100nF  [C0402]  72.07,35.88 270 bottom
C2303  100nF  [C0402]  72.39,29.05 90 bottom
C2312  N/A  [C0402]  73.66,35.88 90 bottom
C2313  N/A  [C0402]  73.66,29.05 270 bottom
C2314  4.3pF  [C0402]  76.2,33.66 180 bottom
C2315  4.3pF  [C0402]  76.2,31.11 180 bottom
C2316  N/A  [C0402]  82.55,28.57 180 bottom
C2317  4.7pF  [C0402]  81.28,35.56 90 bottom
C2318  4.7pF  [C0402]  83.19,31.75 180 bottom
C2321  4.7pF  [C0402]  85.72,34.29 90 bottom
C2322  4.7pF  [C0402]  86.36,30.48 270 bottom
C2323  4.7pF  [C0402]  91.44,29.84 270 bottom
C2401  10uF  [C0402]  8.57,94.93 0 bottom
C2402  10uF  [C0402]  14.29,92.71 180 bottom
C2403  10uF  [C0402]  14.29,94.93 180 bottom
C2404  10nF  [C0402]  18.73,89.85 90 bottom
C2405  3.3uF  [C0402]  14.61,84.14 270 bottom
C2411  0.47uF  [C0402]  16.83,80.64 180 bottom
C2412  100nF  [C0402]  19.37,80.64 180 bottom
C2421  22uF  [C0402]  17.78,78.42 0 bottom
C2422  22uF  [C0402]  17.78,76.52 0 bottom
C2423  22uF  [C0402]  17.78,74.61 0 bottom
C2501  10uF  [C0402]  22.54,71.44 180 bottom
C2502  1uF  [C0402]  22.54,69.22 180 bottom
C2503  47nF  [C0402]  13.97,72.39 90 top
C2504  10uF  [C0402]  16.51,67.31 0 bottom
C2505  10uF  [C0402]  20.32,67.31 180 bottom
C2511  10uF  [C0402]  7.94,65.41 90 bottom
C2521  1uF  [C0402]  11.43,72.39 180 bottom
C2541  100nF  [C0402]  14.61,61.28 0 bottom
C2601  10uF  [C0402]  13.65,89.22 180 bottom
C2602  100nF  [C0402]  3.81,82.55 90 bottom
C2603  10nF  [C0402]  6.67,80.64 90 top
C2605  10nF  [C0402]  8.26,87.63 90 bottom
C2606  4.7uF  [C0402]  7.94,83.5 90 bottom
C2652  10uF  [C0402]  10.48,77.47 0 bottom
C2653  10nF  [C0402]  13.49,80.64 90 bottom
C2682  1F_6V_SCMR18H105MRBB0  [C115-080X160_POL]  17.78,60.96 0 top
C2701  4.7uF  [C0603]  46.04,23.81 90 bottom
C2703  10uF  [C0402]  24.45,84.14 270 bottom
C2711  10uF  [C0603]  43.5,26.99 180 bottom
C2801  4.7uF  [C0402]  25.4,73.18 180 top
C2901  100nF  [C0402]  27.15,64.93 270 bottom
C2902  100nF  [C0402]  25.56,66.2 270 bottom
C2903  100nF  [C0402]  26.35,71.12 0 top
C3001  100nF  [C0402]  31.43,50.16 270 bottom
C3002  100nF  [C0402]  30.48,58.1 0 bottom
C3003  100nF  [C0402]  28.89,54.61 270 bottom
C3101  100nF  [C0402]  35.24,50.16 270 bottom
C3102  100nF  [C0402]  34.29,58.1 0 bottom
C3103  100nF  [C0402]  33.66,50.16 270 bottom
C3201  100nF  [C0402]  41.12,52.42 270 bottom
C3202  100nF  [C0402]  39.37,58.1 180 bottom
C3203  100nF  [C0402]  39.05,51.59 180 bottom
C3204  100nF  [C0402]  71.91,48.1 180 top
C3205  100nF  [C0402]  55.72,75.56 90 top
C3303  1nF  [C0402]  85.41,6.67 0 top
C3471  0pF  [C0402]  9.84,42.23 90 bottom
C3472  0pF  [C0402]  5.08,37.78 270 bottom
C3481  0pF  [C0402]  3.97,21.59 0 bottom
C3482  0pF  [C0402]  5.08,29.21 90 bottom
C3483  0.5pF  [C0402]  18.73,22.54 180 top
C3485  1.2pF  [C0402]  16.51,21.59 90 top
C3486  1.8pF  [C0402]  15.72,23.97 0 top
C3488  1.5pF  [C0402]  7.3,20.64 270 top
C3489  1.2pF  [C0402]  4.76,21.59 180 top
C3491  0pF  [C0402]  5.24,49.53 180 bottom
C3492  0pF  [C0402]  5.08,57.47 90 bottom
C3493  100nF  [C0402]  23.65,45.24 0 top
D1101  ASMT-YTB7-0AA02_RGB  [ASMT-YTB7_0AA02_RGB]  48.26,3.17 270 top
D1901  CMAD6001  [SOD923]  11.75,30.48 0 bottom
D1902  MMSZ4690-E3-08 (5.6V)  [SOD123]  17.78,44.61 0 bottom
D2521  CRS08  [SOD80C]  16.51,71.12 90 bottom
D2681  CRS08  [SOD80C]  1.91,76.04 90 bottom
D2901  CRS08  [SOD80C]  28.26,64.77 90 top
D2902  CRS08  [SOD80C]  27.62,60.96 270 bottom
FM1  [FIDUCIAL_MARK_1MM]  25.4,12.7 0 top
FM2  [FIDUCIAL_MARK_1MM]  48.26,94.14 0 top
FM3  [FIDUCIAL_MARK_1MM]  94.61,38.73 0 top
H3711  MOUNT-PAD-ROUND3.0  [3,0-PAD]  91.44,5.08 0 top
H3721  MOUNT-PAD-ROUND3.0  [3,0-PAD]  5.08,91.44 0 top
H3731  MOUNT-PAD-ROUND3.0  [3,0-PAD]  91.44,91.44 0 top
L0411  10uH  [L0603]  49.85,59.05 270 top
L1701  10uH  [L0603]  77.47,87.63 0 bottom
L1801  10uH  [L0603]  77.15,87.63 90 top
L2201  15uH  [L_3.00MM_X_3.00MM]  76.83,19.37 270 top
L2261  0R  [L0603]  82.39,21.59 0 bottom
L2262  47nH  [L0603]  82.87,20 0 bottom
L2263  2.5nH  [L0603]  85.72,21.59 0 bottom
L2264  4.7nH  [L0603]  92.08,21.69 0 bottom
L2282  9.1nH  [L0603]  91.44,16.83 90 bottom
L2291  15nH  [L0603]  82.55,20.32 180 top
L2311  22nH  [L0603]  70.64,28.26 90 bottom
L2312  100nH  [L0603]  74.93,35.88 90 bottom
L2313  100nH  [L0603]  75.56,28.89 270 bottom
L2314  43nH  [L0603]  79.38,33.66 180 bottom
L2315  43nH  [L0603]  79.38,31.11 180 bottom
L2316  22nH  [L0603]  82.55,29.84 0 bottom
L2317  22nH  [L0603]  83.19,33.66 180 bottom
L2321  22nH  [L0603]  88.27,33.02 180 bottom
L2411  2.2uH  [L_6.00MM_X_6.00MM]  17.46,76.52 180 top
L2501  2.2uH  [L_6.00MM_X_6.00MM]  18.1,69.53 90 top
L2601  22uH  [WE-TPC_3MM8-3MM8_R-1MM3]  10.48,87.63 90 top
L2651  10uH  [L_4.90MM_X_4.90MM]  10.41,76.2 180 top
L2711  2.2uH  [L_4.50MM_X_3.20MM]  39.37,25.4 270 bottom
L2891  2.2uH  [L_4.90MM_X_4.90MM]  25.4,83.82 270 top
L3484  1.2nH  [L0603]  18.73,20.64 180 top
L3486  4.7nH  [L0603]  14.61,21.59 90 top
L3487  2.7nH  [L0603]  11.11,20.95 180 top
L3488  4.7nH  [L0603]  7.62,20.64 90 bottom
L3493  WE-CBF_300R  [L3216C]  2.86,46.99 270 bottom
PF3311  1.1A/2.2A  [M1206]  77.79,72.07 180 top
Q0321  ABS07-32.768KHZ  [ABS07]  48.26,66.04 0 top
Q1321  ABS07-32.768KHZ  [ABS07]  47.78,38.89 0 bottom
Q2211  ABM3B-32.0000MHZ  [ABM3B]  73.34,10.79 0 bottom
Q2311  ABM3B-16.0000MHZ  [ABM3B]  67.94,39.05 0 bottom
R0121  0R  [R0402]  56.52,56.2 0 bottom
R0201  220kR  [R0402]  85.09,89.85 0 bottom
R0202  220kR  [R0402]  87.31,93.34 90 bottom
R0222  33kR  [R0402]  49.53,81.28 180 bottom
R0401  0R  [R0402]  49.21,61.28 0 top
R0421  0R  [R0402]  61.59,66.36 180 bottom
R0441  0R  [R0402]  48.9,49.85 90 bottom
R0521  100kR  [R0402]  33.5,80.8 90 bottom
R0531  47R  [R0402]  30,80.49 90 bottom
R0581  1MR  [R0402]  33.97,78.42 180 bottom
R0582  1MR  [R0402]  30.16,50.16 270 bottom
R0583  1MR  [R0402]  30.48,58.42 90 top
R0584  1MR  [R0402]  34.29,58.42 90 top
R0585  1MR  [R0402]  33.97,76.52 180 bottom
R0586  1MR  [R0402]  38.1,58.42 90 top
R0587  1MR  [R0402]  54.29,78.42 270 top
R0588  1MR  [R0402]  50.48,77.79 0 bottom
R0589  1MR  [R0402]  43.81,38.42 180 top
R0590  1MR  [R0402]  48.9,34.92 270 top
R0591  1MR  [R0402]  34.61,74.61 0 bottom
R0592  1MR  [R0402]  11.11,72.39 180 top
R0593  1MR  [R0402]  7.62,70.17 90 top
R0594  1MR  [R0402]  51.75,13.65 90 bottom
R0595  1MR  [R0402]  77.47,27.3 90 top
R0596  1MR  [R0402]  50.48,79.38 0 bottom
R0611  1.0kR  [R0402]  10.79,5.71 90 top
R0612  1.0kR  [R0402]  12.38,5.71 90 top
R0621  100kR  [R0402]  33.97,70.17 90 bottom
R0631  47R  [R0402]  29.21,69.85 90 top
R0681  1MR  [R0402]  29.21,80.33 90 top
R0682  1MR  [R0402]  25.4,80.01 180 top
R0683  1MR  [R0402]  8.57,72.39 180 top
R0684  1MR  [R0402]  34.61,66.67 180 bottom
R0685  1MR  [R0402]  73.66,87.31 90 top
R0686  1MR  [R0402]  64.14,34.61 90 bottom
R0687  1MR  [R0402]  34.61,65.09 180 bottom
R0688  1MR  [R0402]  47.31,26.04 0 bottom
R0689  1MR  [R0402]  39.69,63.82 0 top
R0693  1MR  [R0402]  39.69,66.36 0 top
R0694  1MR  [R0402]  82.87,48.58 270 bottom
R0695  1MR  [R0402]  82.87,45.4 90 bottom
R0696  1MR  [R0402]  90.81,46.99 90 bottom
R0891  0R  [R0402]  62.23,75.56 270 top
R0892  0R  [R0402]  62.87,75.56 270 bottom
R0901  47R  [R0402]  75.25,44.45 180 bottom
R0902  47R  [R0402]  75.25,46.99 180 bottom
R0903  47R  [R0402]  75.72,50.32 270 bottom
R0904  47R  [R0402]  79.69,52.07 0 bottom
R0905  47R  [R0402]  79.69,54.61 0 bottom
R0906  47R  [R0402]  79.69,57.15 0 bottom
R1031  220kR  [R0402]  50.16,13.65 270 bottom
R1051  1.5kR  [R0402]  62.23,23.18 0 bottom
R1052  2.0kR  [R0402]  62.23,24.77 180 bottom
R1053  27R  [R0402]  55.24,25.4 90 bottom
R1111  1.5kR  [R0402]  62.23,10.79 0 bottom
R1112  2.0kR  [R0402]  62.23,12.38 180 bottom
R1113  27R  [R0805]  55.24,12.7 90 bottom
R1121  1.5kR  [R0402]  62.23,14.92 0 bottom
R1122  2.0kR  [R0402]  62.23,16.51 180 bottom
R1123  27R  [R0805]  55.24,16.83 90 bottom
R1131  1.5kR  [R0402]  62.23,19.05 0 bottom
R1132  2.0kR  [R0402]  62.23,20.64 180 bottom
R1133  27R  [R0805]  55.24,20.95 90 bottom
R1301  47R  [R0402]  50.8,42.55 270 top
R1302  47R  [R0402]  50.16,34.92 90 top
R1303  47R  [R0402]  43.81,36.51 0 top
R1304  47R  [R0402]  52.7,39.37 180 top
R1331  2kR  [R0402]  52.7,37.47 0 top
R1332  2kR  [R0402]  52.7,35.88 0 top
R1521  100kR  [R0402]  40.01,83.82 270 top
R1531  10kR  [R0402]  41.4,83.82 90 top
R1538  47R  [R0402]  48.26,80.49 0 top
R1539  47R  [R0402]  65.44,78.74 270 top
R1541  47R  [R0402]  44.77,77.47 270 top
R1542  1MR  [R0402]  43.18,77.47 90 top
R1543  33kR  [R0402]  40.16,75.72 270 bottom
R1623  47R  [R0402]  65.41,82.3 180 top
R1631  47R  [R0402]  65.44,85.09 0 top
R1632  47R  [R0402]  65.44,86.49 0 top
R1643  47R  [R0402]  56.44,83.69 180 top
R1644  47R  [R0402]  56.44,82.32 180 top
R1651  47R  [R0402]  53.18,75.56 90 bottom
R1661  N/A  [R0402]  63.5,78.34 0 bottom
R1711  10kR  [R0402]  90.81,79.38 90 bottom
R1712  100R  [R0402]  88.58,84.94 0 bottom
R1721  10kR  [R0402]  88.27,79.38 90 bottom
R1722  100R  [R0402]  83.06,84.94 0 bottom
R1751  47R  [R0402]  69.69,74.61 270 bottom
R1752  47R  [R0402]  70.96,74.61 270 bottom
R1753  47R  [R0402]  72.23,74.61 270 bottom
R1761  47R  [R0402]  68.42,74.61 270 bottom
R1811  0R  [R0402]  80.33,81.28 90 top
R1812  0R  [R0402]  80.33,78.11 270 top
R1821  47R  [R0402]  69.53,80.64 0 top
R1822  47R  [R0402]  72.39,77.47 90 top
R1823  47R  [R0402]  69.53,79.06 0 top
R1824  47R  [R0402]  77.79,77.47 90 top
R1831  560R  [R0402]  91.44,71.12 180 bottom
R1841  560R  [R0402]  84.14,68.58 180 bottom
R1901  10kR  [R0402]  17.46,25.72 90 top
R1941  NTC 10kR  [R0402]  22.38,41.75 180 bottom
R1942  10kR  [R0402]  24.92,41.75 180 bottom
R1943  4.7kR  [R0402]  21.59,34.29 270 top
R1944  4.7kR  [R0402]  23.5,34.29 270 top
R1951  47R  [R0402]  6.35,4.92 180 top
R1952  47R  [R0402]  15.24,4.45 0 top
R1953  47R  [R0402]  15.24,6.03 180 top
R1961  22R  [R0402]  11.43,28.26 0 bottom
R1962  22R  [R0402]  11.43,26.99 0 bottom
R2011  1kR  [R0402]  34.29,36.51 180 bottom
R2012  1kR  [R0402]  34.29,33.34 180 bottom
R2013  1kR  [R0402]  34.29,29.84 180 bottom
R2014  1kR  [R0402]  34.29,31.75 180 bottom
R2015  1kR  [R0402]  17.46,29.84 90 top
R2016  1kR  [R0402]  27.3,41.59 90 bottom
R2017  1kR  [R0402]  26.35,44.45 90 bottom
R2018  1kR  [R0402]  13.02,32.7 90 bottom
R2111  1kR  [R0402]  37.15,61.59 90 bottom
R2112  1kR  [R0402]  49.53,52.07 0 top
R2113  1kR  [R0402]  60.33,46.04 180 top
R2114  1kR  [R0402]  77.47,62.55 180 top
R2121  5.6kR  [R0402]  38.73,61.59 270 bottom
R2122  5.6kR  [R0402]  47.62,53.34 270 top
R2123  5.6kR  [R0402]  63.18,46.04 180 top
R2124  5.6kR  [R0402]  80.01,62.55 180 top
R2211  47R  [R0402]  75.56,24.29 270 bottom
R2221  47R  [R0402]  79.69,23.18 270 top
R2224  47R  [R0402]  77.47,23.81 270 top
R2251  47R  [R0402]  69.85,19.21 90 bottom
R2252  47R  [R0402]  72.39,22.54 0 bottom
R2253  47R  [R0402]  75.56,24.61 90 top
R2321  47R  [R0402]  68.9,28.26 270 bottom
R2331  100kR  [R0402]  63.5,29.21 0 bottom
R2332  100kR  [R0402]  63.5,27.94 0 bottom
R2341  47R  [R0402]  64.77,30.8 180 bottom
R2351  47R  [R0402]  64.77,32.7 180 bottom
R2391  47R  [R0402]  67.31,28.26 90 bottom
R2411  3R  [R0402]  19.37,81.92 180 bottom
R2501  240R  [R0402]  12.06,63.66 90 bottom
R2511  2.27kR  [R0402]  3.81,69.53 90 top
R2512  6.86kR  [R0402]  3.81,66.99 270 top
R2521  0R  [R0402]  18.76,69.59 0 bottom
R2541  33kR  [R0402]  18.73,63.82 90 bottom
R2554  47R  [R0402]  3.81,68.9 90 bottom
R2611  1kR  [R0402]  5.71,80.01 270 bottom
R2612  100kR  [R0402]  10,84.14 0 bottom
R2621  1.82MR  [R0402]  4.45,77.15 90 bottom
R2622  10.0MR  [R0402]  6.35,77.15 270 bottom
R2631  3.65MR  [R0402]  14.29,87.31 270 top
R2632  7.50MR  [R0402]  14.29,84.77 270 top
R2633  1.82MR  [R0402]  14.29,82.23 270 top
R2641  4.75MR  [R0402]  13.34,74.77 90 bottom
R2642  8.20MR  [R0402]  13.34,77.15 90 bottom
R2651  0R  [R0402]  11.43,75.25 270 bottom
R2681  0R  [R0402]  9.05,73.98 270 bottom
R2701  0R  [R0402]  47.94,23.18 0 bottom
R2713  100kR  [R0402]  38.73,18.41 90 bottom
R2731  0R  [R0402]  42.55,29.21 90 bottom
R2801  100kR  [R0402]  29.53,77.15 90 top
R2901  100R  [R0402]  24.77,62.71 180 bottom
R2902  100R  [R0402]  24.77,64.14 180 bottom
R2903  1MR  [R0402]  24.29,70.33 270 bottom
R2904  1MR  [R0402]  30.64,73.03 0 bottom
R2911  47R  [R0402]  49.21,62.71 180 top
R3302  330kR  [R0402]  85.41,8.57 0 top
R3471  0R  [R0603]  7.62,40.64 0 bottom
R3481  0R  [R0603]  5.08,24.13 90 bottom
R3491  0R  [R0603]  5.08,51.75 90 bottom
R3601  47R  [R0402]  60.58,75.56 90 top
R3602  47R  [R0402]  59.69,75.56 90 bottom
R3603  47R  [R0402]  59.18,75.56 90 top
R3604  47R  [R0402]  58.42,75.56 90 bottom
R3605  47R  [R0402]  35.56,93.34 90 bottom
R3606  47R  [R0402]  35.56,87.95 90 bottom
R3607  47R  [R0402]  36.83,93.34 90 bottom
R3608  47R  [R0402]  36.83,87.95 90 bottom
R3609  47R  [R0402]  39.37,93.34 90 bottom
R3610  47R  [R0402]  40.64,93.34 90 bottom
R3611  47R  [R0402]  41.91,93.34 90 bottom
R3612  0R  [R0402]  54.61,93.34 90 bottom
R3613  0R  [R0402]  54.61,87.95 90 bottom
R3614  47R  [R0402]  57.15,93.34 90 bottom
R3615  47R  [R0402]  57.15,87.95 90 bottom
R3616  47R  [R0402]  58.42,93.34 90 bottom
R3617  47R  [R0402]  60.96,93.34 90 bottom
R3618  47R  [R0402]  60.96,87.95 90 bottom
R3619  47R  [R0402]  62.23,93.34 90 bottom
R3620  47R  [R0402]  62.23,87.95 90 bottom
R3621  47R  [R0402]  64.77,93.34 90 bottom
R3622  47R  [R0402]  64.77,87.95 90 bottom
R3623  47R  [R0402]  66.04,87.95 90 bottom
R3666  47R  [R0402]  79.69,55.24 0 top
R3667  47R  [R0402]  79.69,55.88 180 bottom
R3668  47R  [R0402]  79.69,57.78 0 top
R3669  47R  [R0402]  79.69,58.42 180 bottom
R3670  47R  [R0402]  60.96,3.17 270 bottom
R3671  47R  [R0402]  60.96,8.57 270 bottom
R3672  47R  [R0402]  59.69,3.17 270 bottom
R3673  47R  [R0402]  59.69,8.57 270 bottom
R3674  47R  [R0402]  77.47,61.28 0 top
R3675  47R  [R0402]  55.88,3.17 270 bottom
R3676  47R  [R0402]  54.61,3.17 270 bottom
R3677  0R  [R0402]  41.91,3.17 270 bottom
R3678  0R  [R0402]  41.91,8.57 270 bottom
R3679  47R  [R0402]  39.37,3.17 270 bottom
R3680  47R  [R0402]  39.37,8.57 270 bottom
R3681  47R  [R0402]  38.1,3.17 270 bottom
R3682  47R  [R0402]  35.56,3.17 270 bottom
R3683  47R  [R0402]  35.56,8.57 270 bottom
R3684  47R  [R0402]  34.29,3.17 270 bottom
R3685  47R  [R0402]  34.29,8.57 270 bottom
R3686  47R  [R0402]  31.75,3.17 270 bottom
R3687  47R  [R0402]  31.75,8.57 270 bottom
R3688  47R  [R0402]  30.48,8.57 270 bottom
RPOLY3493  50mA/150mA  [R1210]  12.7,45.72 180 top
S0212  KSR223GLFG  [KSR223G_SMD_1POL]  43.18,69.85 270 top
T1051  MMBT2222  [SOT23]  58.42,25.4 90 bottom
T1111  MMBT2222  [SOT23]  58.42,13.02 90 bottom
T1121  MMBT2222  [SOT23]  58.42,17.14 90 bottom
T1131  MMBT2222  [SOT23]  58.42,21.27 90 bottom
TP_+1V2  PTR1B1,27  [B1,27]  36.83,53.34 0 top
TP_+1V2_MCU  PTR1B1,27  [B1,27]  36.83,60.96 0 top
TP_+3V3_HICUR  PTR1B1,27  [B1,27]  34.29,60.96 0 top
TP_+3V3_XO  PTR1B1,27  [B1,27]  31.75,60.96 0 top
TP_+3V3_XO_PA  PTR1B1,27  [B1,27]  29.21,53.34 0 top
TP_AX_ADC1  PTR1TP06R  [TP06R]  65.41,29.21 0 bottom
TP_AX_ADC2  PTR1TP06R  [TP06R]  65.41,27.94 0 bottom
TP_AX_IRQ  PTR1TP06R  [TP06R]  66.67,32.86 0 bottom
TP_AX_TCXO_EN  PTR1TP06R  [TP06R]  66.67,33.66 0 bottom
TP_BQ_VBAT  PTR1B1,27  [B1,27]  26.67,60.96 0 top
TP_BQ_VOUT  PTR1B1,27  [B1,27]  29.21,60.96 0 top
TP_BQ_VSTOR  PTR1B1,27  [B1,27]  1.91,88.9 0 top
TP_IN_CLK1  PTR1B1,27  [B1,27]  58.1,79.38 0 top
TP_IN_CLK2  PTR1B1,27  [B1,27]  60.33,79.38 0 top
TP_LIPO_BAT  PTR1B1,27  [B1,27]  7.62,62.23 0 top
TP_LIPO_CUR  PTR1B1,27  [B1,27]  26.67,68.58 0 top
TP_LIPO_SYS  PTR1B1,27  [B1,27]  21.91,68.58 0 top
TP_SX_DIO1  PTR1TP06R  [TP06R]  69.85,24.13 0 bottom
TP_SX_DIO2  PTR1TP06R  [TP06R]  69.85,21.59 0 bottom
TP_SX_DIO3  PTR1TP06R  [TP06R]  69.85,16.51 0 bottom
TP_VBAT  PTR1B1,27  [B1,27]  26.67,53.34 0 top
TP_VSOL  PTR1B1,27  [B1,27]  1.91,76.52 0 top
TP_VUSB_SW  PTR1B1,27  [B1,27]  24.13,68.58 0 top
U0111  STM32L4Z_144PIN_SMPS  [LQFP144]  63.5,60.96 0 top
U0521  PCAL6416APW  [TSSOP24_SOT355-1]  34.29,77.47 270 top
U0621  PCAL6416APW  [TSSOP24_SOT355-1]  34.29,67.31 270 top
U0711  IS25LP032D  [SOIC8_150MIL]  67.47,43.18 180 top
U0721  IS25LP032D  [SOIC8_150MIL]  44.77,60.33 0 top
U0801  CAT24C64  [SOIC8_150MIL]  30.48,68.58 0 bottom
U0911  ZIO_EINK_1IN54  [ZIO_EINK_1IN54]  77.47,49.53 180 top
U1001  MIDAS_MCCOG21605B6W-FPTLWI  [MIDAS_MCCOG21605B6W-FPTLWI]  22.86,10.48 0 top
U1301  BNO085  [BNO085_LGA28]  48.26,38.73 0 top
U1401  BME680  [BME680]  10.79,2.22 90 top
U1501  LM4120IM5-3.0  [SOT95P285X120-5N]  48.9,83.82 90 top
U1511  MAX5217  [µMAX8]  35.56,83.82 0 top
U1531  CFPT-141-20MHZ  [CFPT-141]  44.45,82.55 0 top
U1541  OPA354  [SOT-23-5]  44.45,77.47 270 bottom
U1542  LPV811  [SOT-23-5]  39.05,79.38 270 bottom
U1601  Si5338  [QFN24_P0MM5_CTRPAD]  60.96,83.82 90 top
U1651  TS5A23166  [R-PDSO-G8]  54.61,78.74 270 bottom
U1701  PCM1863  [R-PDSO-G30]  74.93,81.28 270 bottom
U1801  WM8523  [TSSOP20]  74.93,82.55 270 top
U1901  SIM868  [SIM868]  22.86,30.48 0 bottom
U2201  SX1262  [QFN24-4X4-0P5-PAD]  76.83,20.32 90 bottom
U2271  PE4259  [SC-70_6-LEAD_2X1MM25_0P65]  90.49,22.54 180 top
U2301  AX5243  [QFN20-4X4-0P5-PAD]  69.85,32.38 0 bottom
U2401  LM53603-Q1  [HTSSOP16]  18.41,84.77 0 top
U2501  BQ24193  [VQFN-24]  11.43,68.58 270 top
U2541  LPV811  [SOT-23-5]  15.24,63.5 180 bottom
U2601  BQ25570  [V-PVQFN-20]  10.16,82.07 0 top
U2681  TS5A23166  [R-PDSO-G8]  5.08,73.98 90 bottom
U2701  TPS62743YFPR  [WCSP-8]  41.91,19.05 0 bottom
U2801  TPS62743YFPR  [WCSP-8]  23.65,77.15 90 top
U2901  TS5A23166  [R-PDSO-G8]  26.04,69.53 180 bottom
U3001  TS5A23166  [R-PDSO-G8]  30.48,54.61 0 bottom
U3101  TS5A23166  [R-PDSO-G8]  34.29,54.61 0 bottom
U3201  TS5A23166  [R-PDSO-G8]  38.1,54.61 0 bottom
U3491  TS5A23166  [R-PDSO-G8]  19.37,45.88 270 top
U3492  TDK B4310  [QCS5P]  5.08,46.99 0 bottom
X0201  [2X05_1MM27_SHROUDED_CORTEX_JTAG_SWD]  83.19,93.34 180 top
X0221  [1X02]  52.7,81.28 0 top
X1201  TTE_EN11-HSM  [TTE_EN11-HSM]  87.12,46.99 270 top
X1951  MICROSIM-8P_SDCARD-8P_MOLEX-104642-1610  [MICROSIM-8P_SDCARD-8P_MOLEX-104642-1610]  10.79,9.09 0 bottom
X1961  [2X02]  9.84,33.66 180 top
X2411  WIRE-TO-BOARD_5MM08_1X02  [WIRE-TO-BOARD_5MM08_1X02]  13.97,92.71 90 top
X2551  JST_S3B-XH-A  [JST_S3B-XH-A]  1.27,68.58 90 top
X2601  WIRE-TO-BOARD_5MM08_1X02  [WIRE-TO-BOARD_5MM08_1X02]  3.81,82.55 180 top
X3301  MOLEX 105017-0001  [USB-B-MICRO-SMD_MOLEX-105017-0001]  82.55,0.71 0 top
X3401  SMA_SMT_AMPHENOL-901-143  [SMA_SMT_AMPHENOL_901-143]  91.44,13.97 270 top
X3411  SAMTEC SMA-J-P-H-RA-TH1  [SMA_SMT_AMPHENOL_901-143]  91.44,33.02 270 top
X3471  SMA_SMT_AMPHENOL-901-143, SAMTEC SMA-J-P-H-RA-TH1  [SMA_SMT_AMPHENOL_901-143]  5.08,40.64 90 top
X3481  SMA_SMT_AMPHENOL-901-143, SAMTEC SMA-J-P-H-RA-TH1  [SMA_SMT_AMPHENOL_901-143]  5.08,26.67 90 top
X3491  SMA_SMT_AMPHENOL-901-143, SAMTEC SMA-J-P-H-RA-TH1  [SMA_SMT_AMPHENOL_901-143]  5.08,54.61 90 top
X3501  CUI SJ1-3535NS  [SJ1-353XNS_3MM5-STEREO-AUDIO-JACKS]  90.17,81.92 180 top
X3511  CUI SJ1-3535NS  [SJ1-353XNS_3MM5-STEREO-AUDIO-JACKS]  90.17,69.85 180 top
X3611  2X20/90_1MM27_HARWIN_M50-3202045_SOCKET  [2X20/90_1MM27_HARWIN_M50-3202045_SOCKET]  34.29,95.25 0 top
X3612  2X20/90_1MM27_HARWIN_M50-3202045_SOCKET  [2X20/90_1MM27_HARWIN_M50-3202045_SOCKET]  63.5,95.25 0 top
X3631  2X20/90_1MM27_HARWIN_M50-3202045_SOCKET  [2X20/90_1MM27_HARWIN_M50-3202045_SOCKET]  62.23,1.27 180 top
X3632  2X20/90_1MM27_HARWIN_M50-3202045_SOCKET  [2X20/90_1MM27_HARWIN_M50-3202045_SOCKET]  33.02,1.27 180 top

## Library data of the parts
C0213 C0311 C0332 C0401-C0410 C0412 C0413 C0421-C0423 C0441 C0442 C0451 C0521 C0621 C0711 C0721 C0801 C0901 C1001 C1011 C1012 C1101 C1201-C1203 C1301-C1303 C1321 C1322 C1401 C1501 C1511 C1512 C1522 C1531 C1532 C1541-C1543 C1601-C1605 C1615 C1616 C1701-C1706 C1711 C1712 C1721 C1722 C1801-C1803 C1811 C1812 C1831 C1841 C1901-C1904 C1951-C1955 C1961 C2201-C2205 C2263-C2267 C2271 C2272 C2281-C2283 C2291-C2293 C2301-C2303 C2312-C2318 C2321-C2323 C2401-C2405 C2411 C2412 C2421-C2423 C2501-C2505 C2511 C2521 C2541 C2601-C2603 C2605 C2606 C2652 C2653 C2682 C2701 C2703 C2711 C2801 C2901-C2903 C3001-C3003 C3101-C3103 C3201-C3205 C3303 C3471 C3472 C3481-C3483 C3485 C3486 C3488 C3489 C3491-C3493 L0411 L1701 L1801 L2201 L2261-L2264 L2282 L2291 L2311-L2317 L2321 L2411 L2501 L2601 L2651 L2711 L2891 L3484 L3486-L3488 R0121 R0201 R0202 R0222 R0401 R0421 R0441 R0521 R0531 R0581-R0596 R0611 R0612 R0621 R0631 R0681-R0689 R0693-R0696 R0891 R0892 R0901-R0906 R1031 R1051-R1053 R1111 R1112 R1121 R1122 R1131 R1132 R1301-R1304 R1331 R1332 R1521 R1531 R1538 R1539 R1541-R1543 R1623 R1631 R1632 R1643 R1644 R1651 R1661 R1711 R1712 R1721 R1722 R1751-R1753 R1761 R1811 R1812 R1821-R1824 R1831 R1841 R1901 R1941-R1944 R1951-R1953 R1961 R1962 R2011-R2018 R2111-R2114 R2121-R2124 R2211 R2221 R2224 R2251-R2253 R2321 R2331 R2332 R2341 R2351 R2391 R2411 R2501 R2511 R2512 R2521 R2541 R2554 R2611 R2612 R2621 R2622 R2631-R2633 R2641 R2642 R2651 R2681 R2701 R2713 R2731 R2801 R2901-R2904 R2911 R3302 R3471 R3481 R3491 R3601-R3623 R3666-R3688 = df4iah_rcl
C0331 = df4iah_c-trimm
D1101 = df4iah_led
D1901 D1902 D2521 D2681 D2901 D2902 = df4iah_diode
FM1-FM3 = df4iah_fiducial
H3711 H3721 H3731 = df4iah_holes
L3493 PF3311 R1113 R1123 R1133 RPOLY3493 = rcl
Q0321 Q1321 = df4iah_crystal; FARNELL: 2467865; MANUFACTURER: ABS07-32.768KHZ-1-T
Q2211 Q2311 = df4iah_crystal
S0212 X1201 = df4iah_switch
T1051 T1111 T1121 T1131 = transistor
TP_+1V2 TP_+1V2_MCU TP_+3V3_HICUR TP_+3V3_XO TP_+3V3_XO_PA TP_AX_ADC1 TP_AX_ADC2 TP_AX_IRQ TP_AX_TCXO_EN TP_BQ_VBAT TP_BQ_VOUT TP_BQ_VSTOR TP_IN_CLK1 TP_IN_CLK2 TP_LIPO_BAT TP_LIPO_CUR TP_LIPO_SYS TP_SX_DIO1-TP_SX_DIO3 TP_VBAT TP_VSOL TP_VUSB_SW = testpad
U0111 = df4iah_stm32l4
U0521 U0621 = df4iah_dataconvertion
U0711 U0721 U0801 = df4iah_memory
U0911 U1001 = df4iah_lcd
U1301 U1401 = df4iah_sensors
U1501 = df4iah_powersupply; MPN: LM4120IM5-3.0; OC_FARNELL: 1312745; OC_NEWARK: 41K5441; PACKAGE: SOT-23-5; SUPPLIER: National Semiconductors
U1511 U1801 = df4iah_dac
U1531 = df4iah_osc; MF: IQD-FREQUENCY-PRODUCTS; MPN: LFTVXO022175; OC_FARNELL: 1100745
U1541 = df4iah_opamp; MPN: OPA354AIDBVT; OC_FARNELL: 1207050; OC_NEWARK: -; PACKAGE: SOT-23-5; SUPPLIER: Texas Instruments
U1542 U2541 = df4iah_opamp; PACKAGE: SOT-23-5
U1601 = df4iah_osc
U1651 U2681 U2901 U3001 U3101 U3201 U3491 = df4iah_sc-switches
U1701 = df4iah_adc
U1901 = df4iah_gsm
U2201 U2271 U2301 U3492 = df4iah_rf
U2401 U2501 U2601 U2701 U2801 = df4iah_powersupply
X0201 X0221 X1961 X2411 X2551 X2601 X3301 X3501 X3511 X3611 X3612 X3631 X3632 = df4iah_connector
X1951 = df4iah_connector; MPN: MOLEX-104642-1610; OC_FARNELL: 2545018
X3401 X3411 X3471 X3481 X3491 = df4iah_connector; MPN: 901-143; OC_FARNELL: 1461631; OC_NEWARK: 51F3841; PACKAGE: RF/COAXIAL, SMA JACK, R/A, 50OHM, THD; SUPPLIER: Amphenol